# EAGLE board 10sensors (EAGLE 9.6.2), part 1 of 3
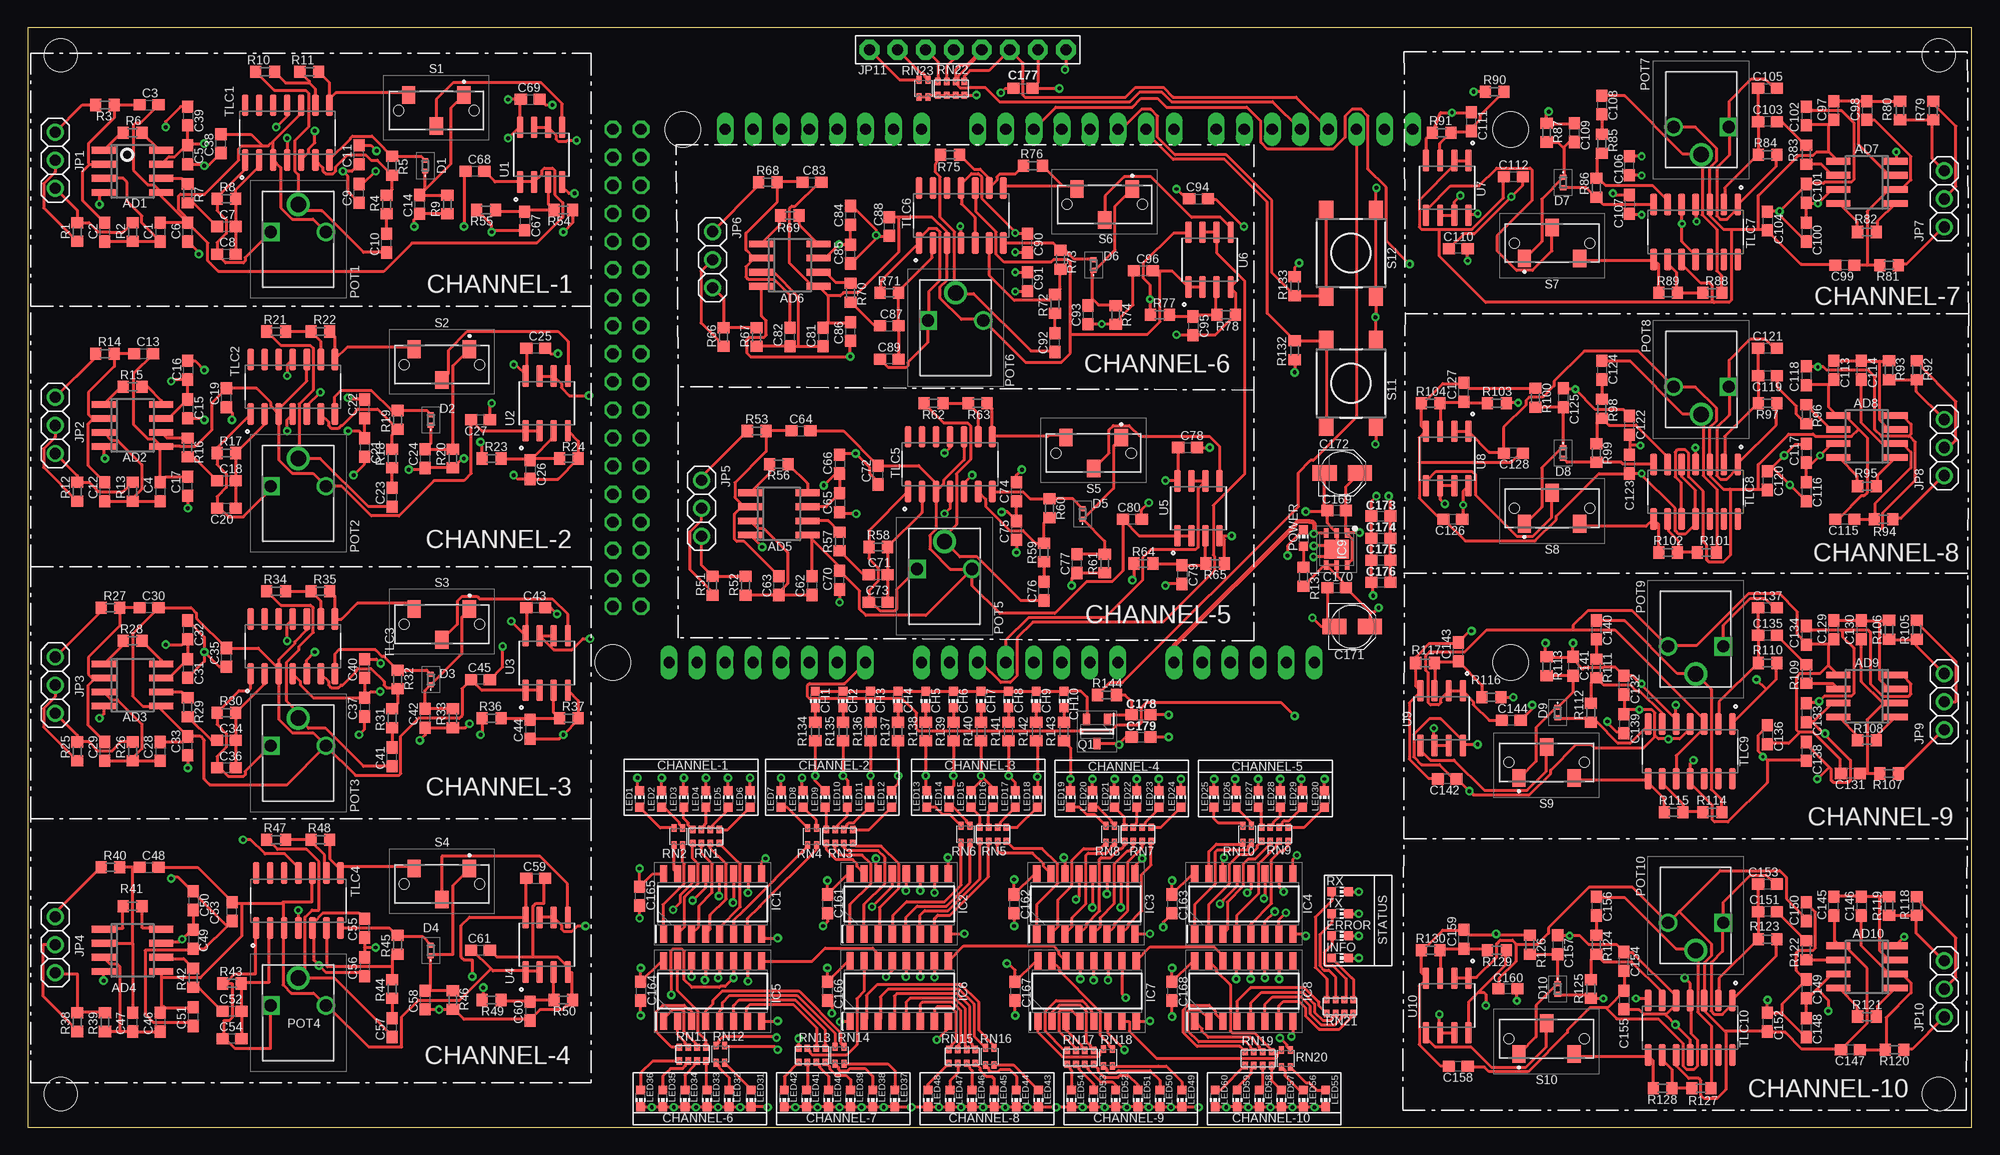
[diagram p0: board, top side]
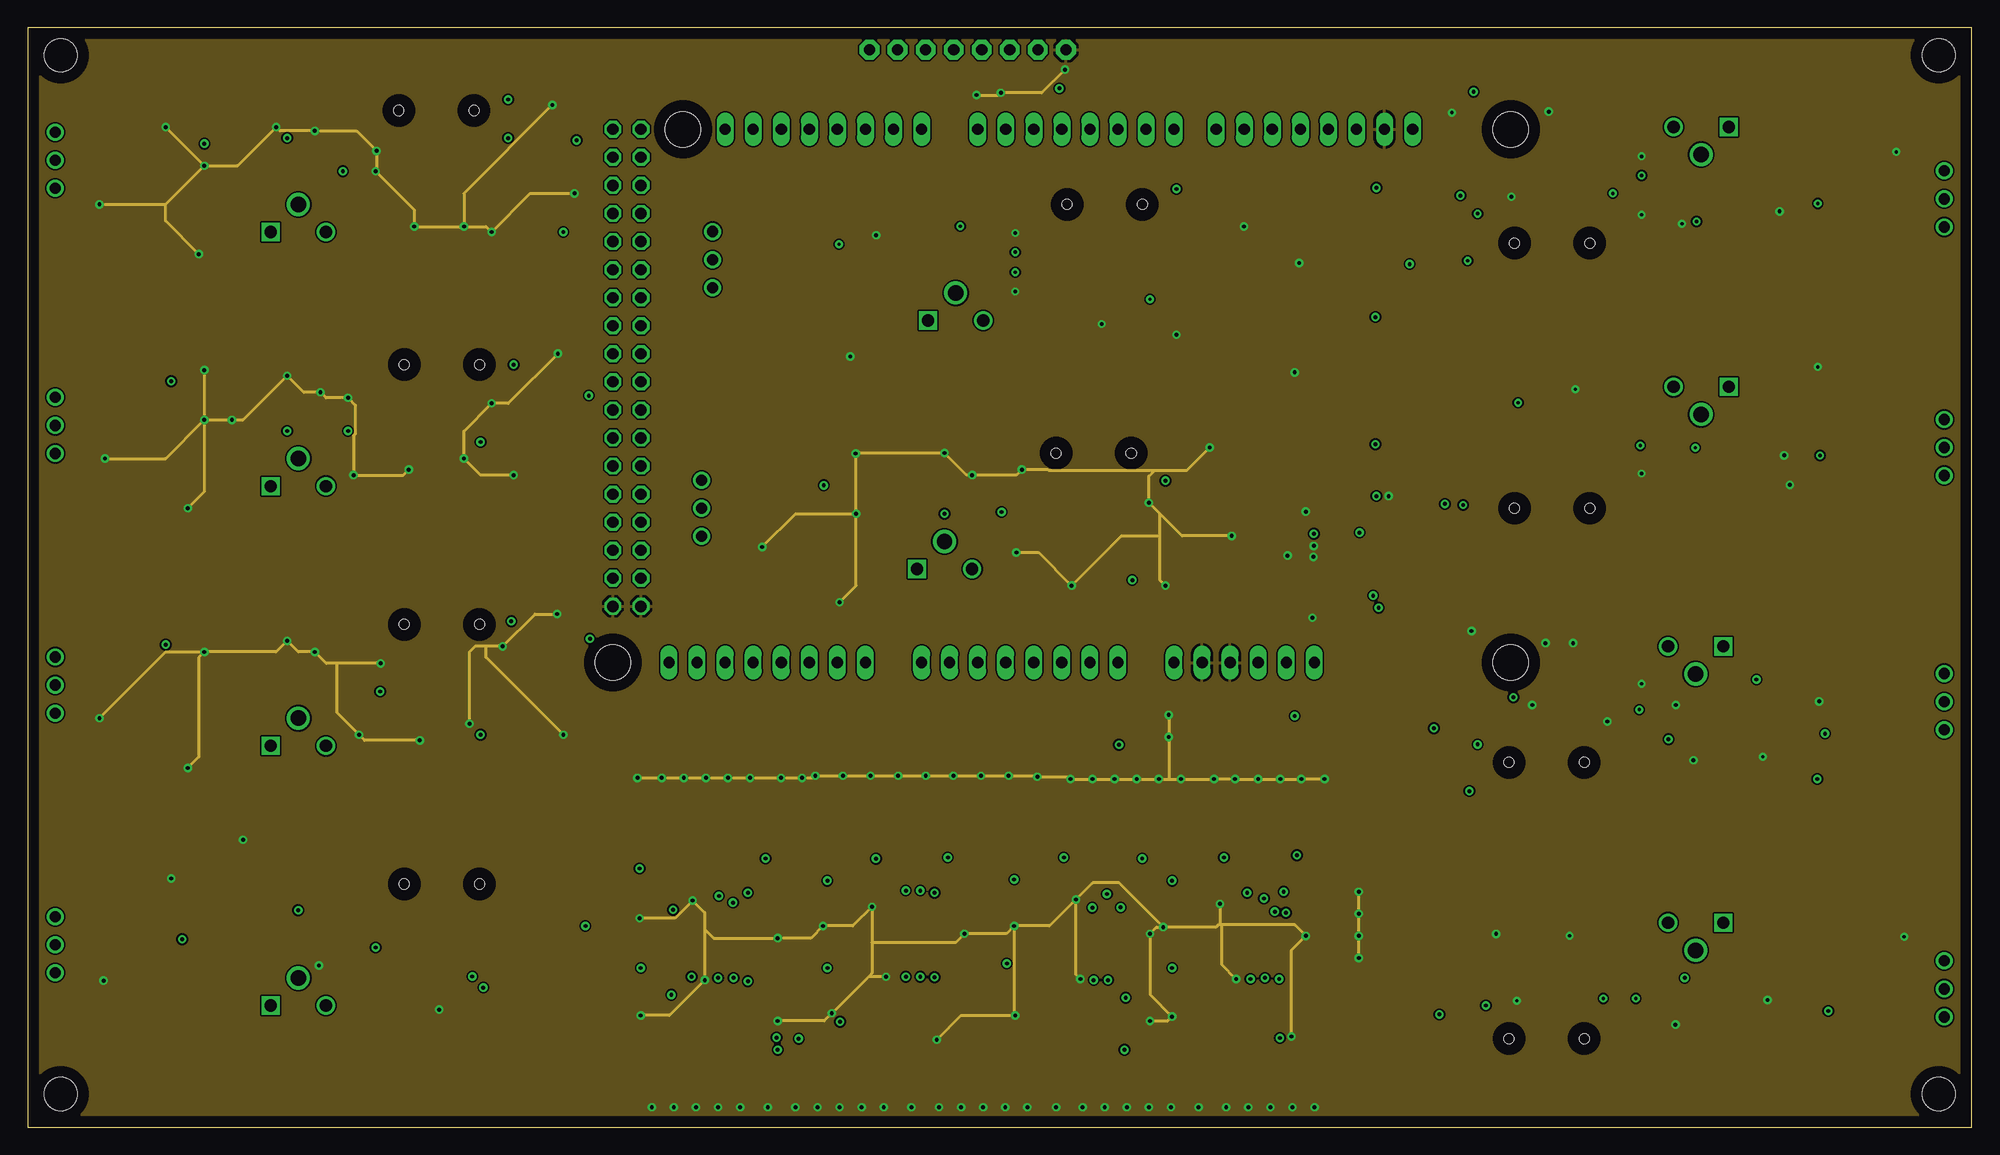
[diagram p1: board, inner layer Route2]
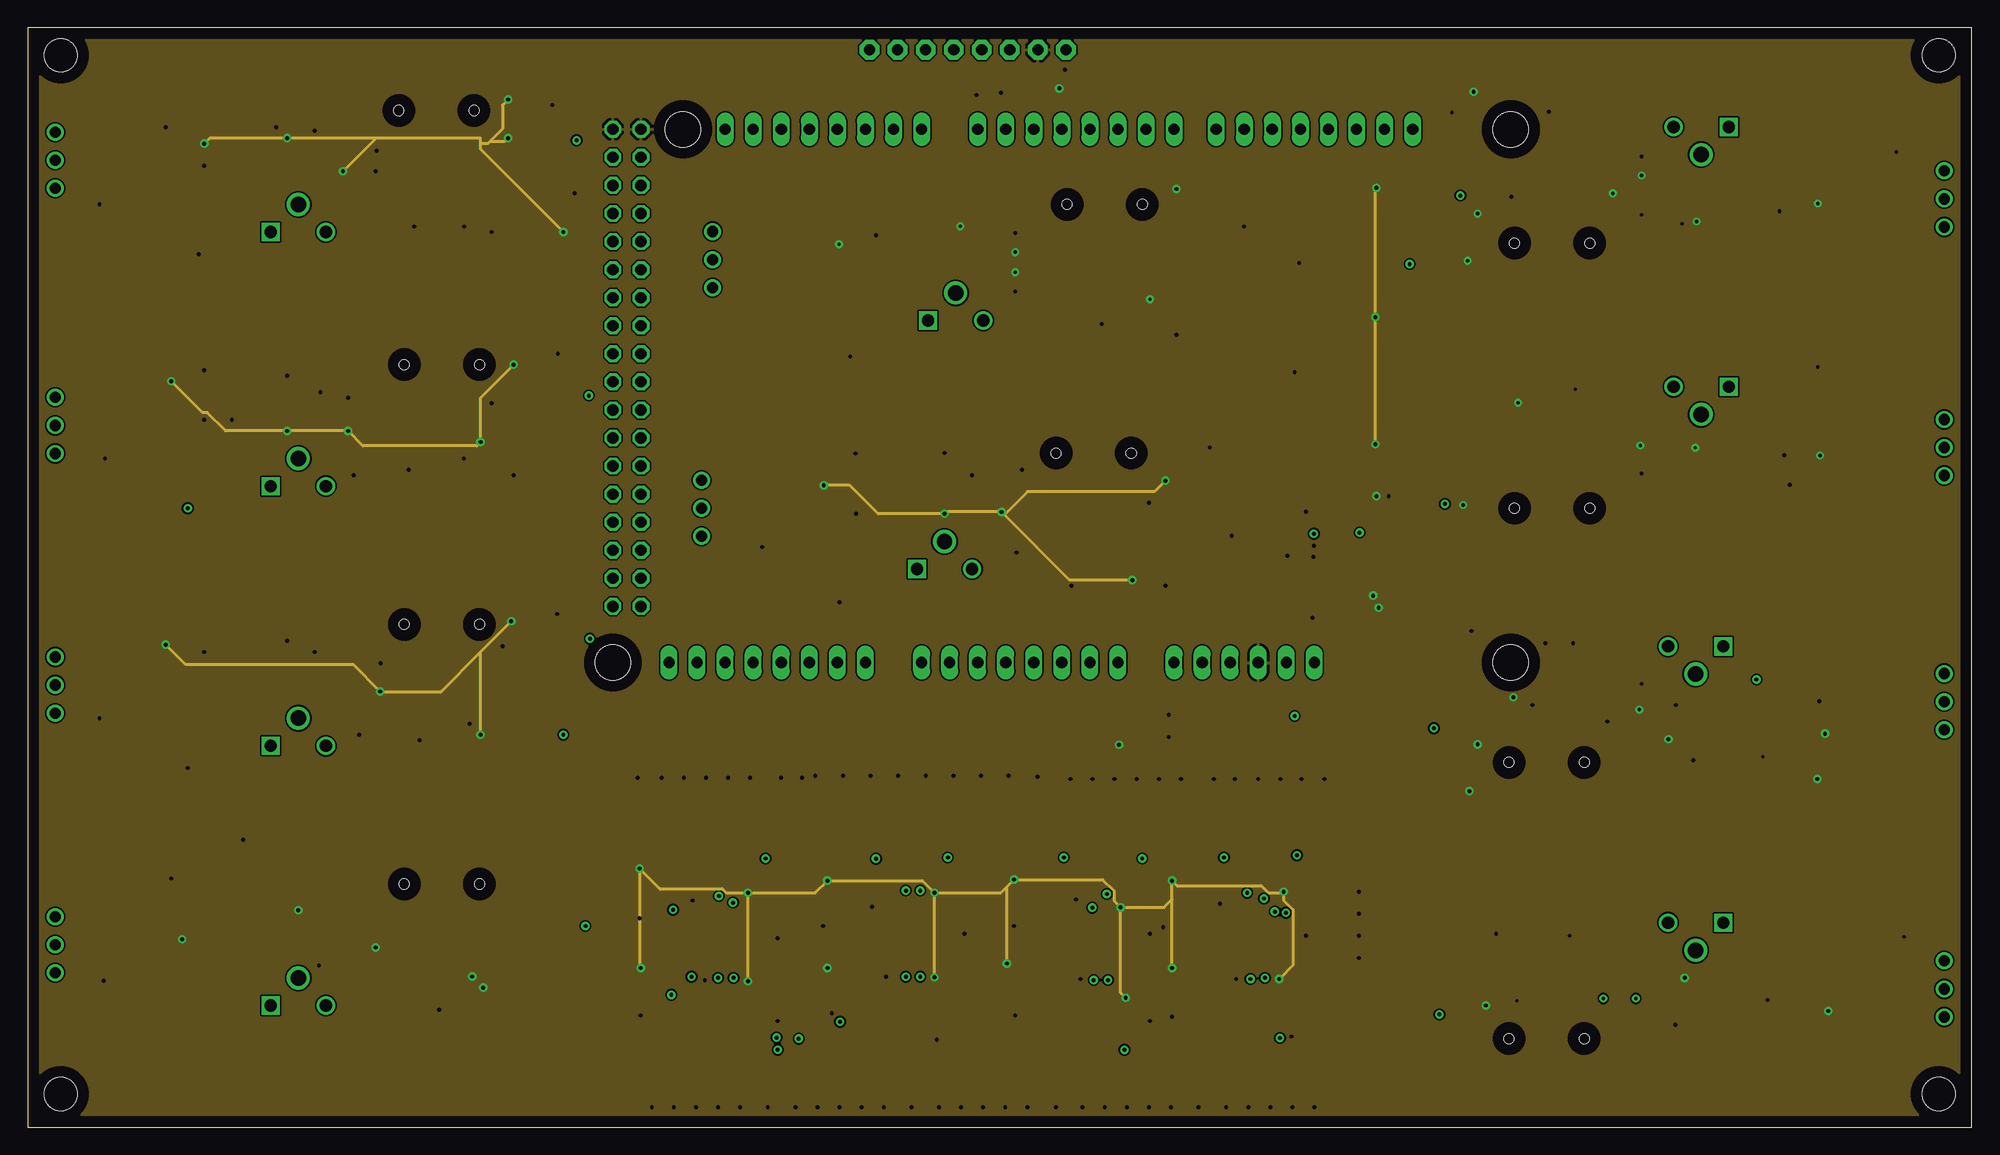
[diagram p2: board, inner layer Route15]
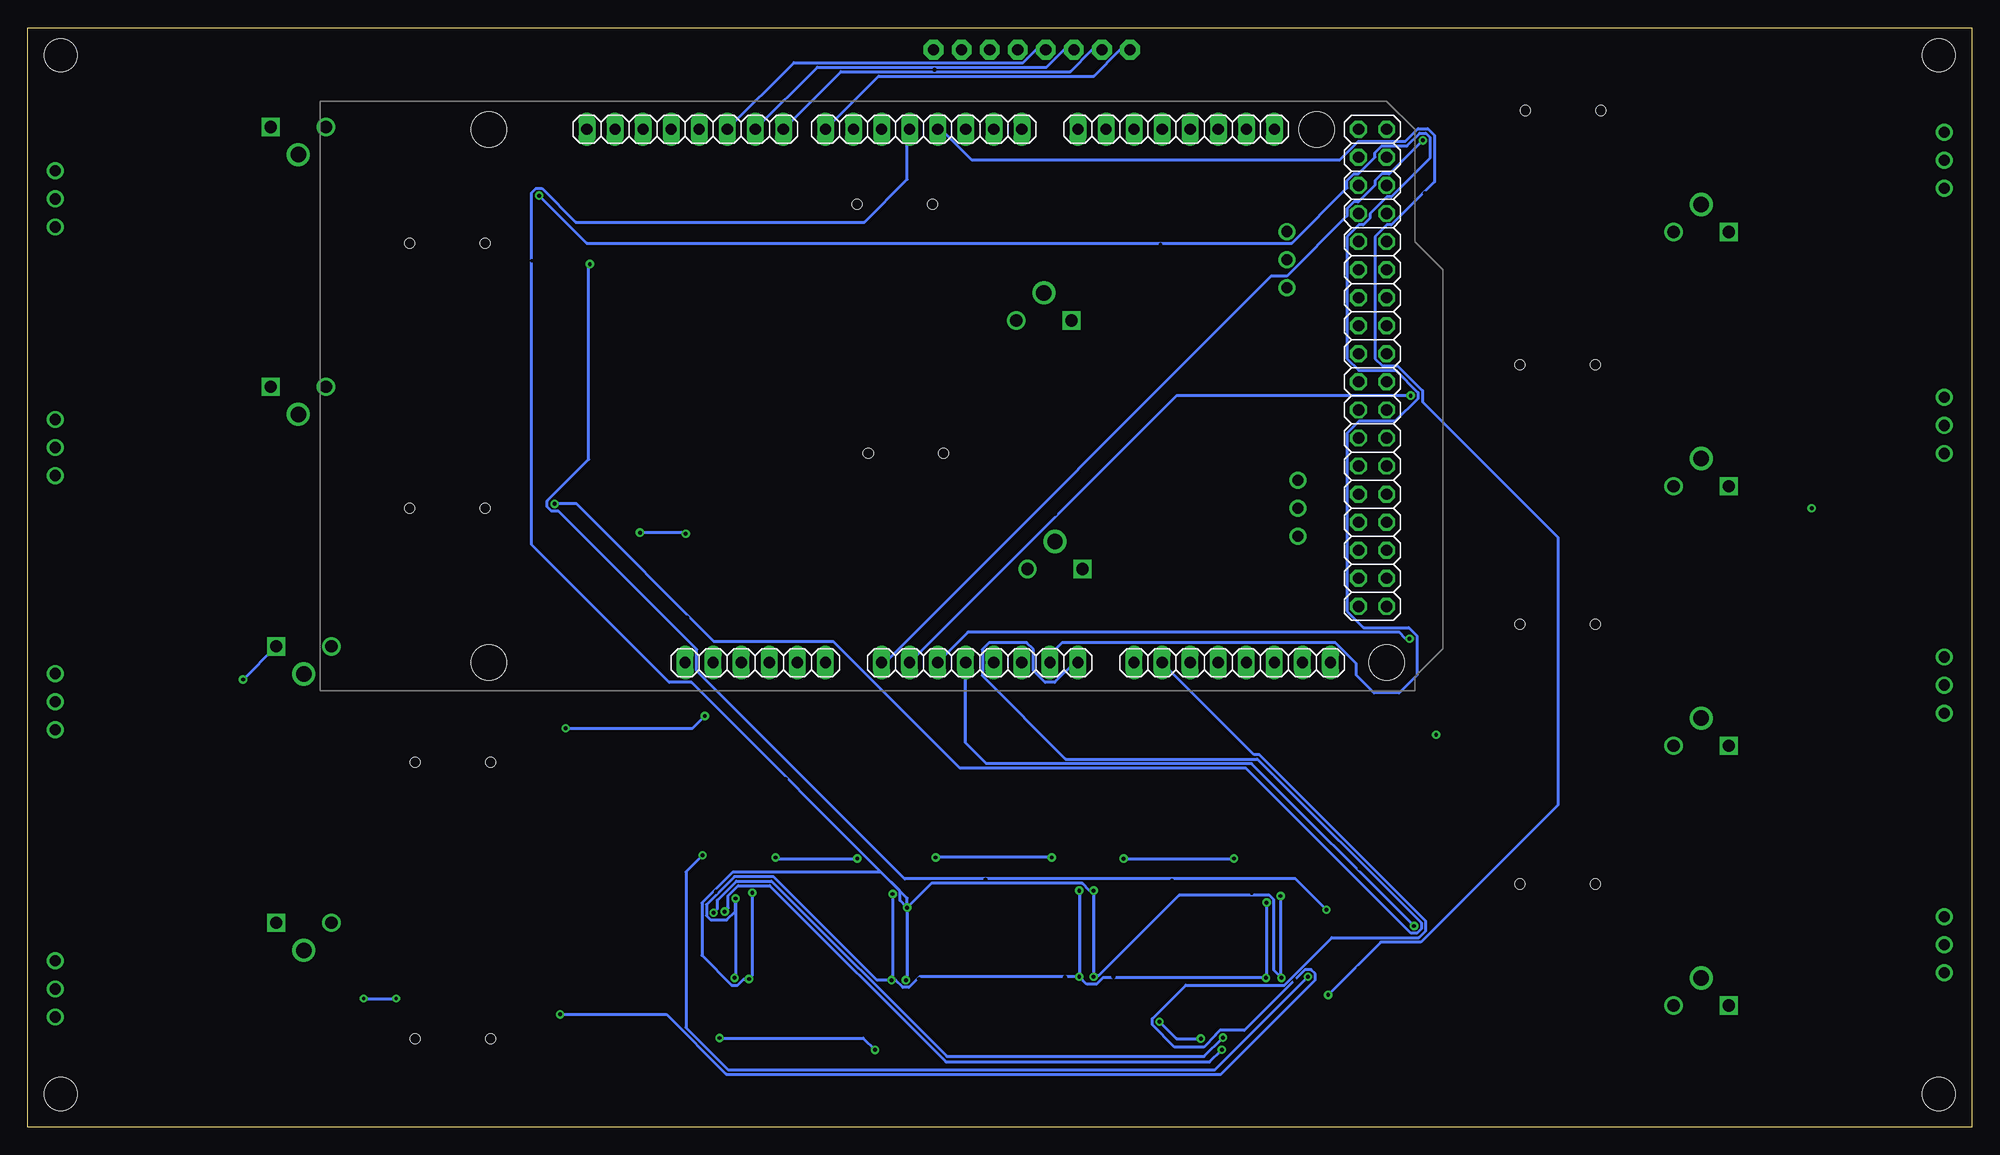
[diagram p3: board, bottom side, seen from below]

Size 176 x 99.5 mm. Coordinates in mm from the lower left corner, seen from the top.
Outline: 0,0 176,0 176,99.5 0,99.5 0,0
Copper layers ([2:[15:1+2*15+16]]): Top 0.035mm / dielectric 1.5mm / Route2 0.035mm / dielectric 0.15mm / Route15 0.035mm / dielectric 0.2mm / Bottom 0.035mm
Design rules "default *": minimum track width 6mil, minimum drill 0.3mm, track to track 6mil, track to pad 6mil, pad to pad 6mil, via to via 6mil, smd to smd 6mil, copper to edge 40mil, drill to drill 6mil, minimum pad ring 10mil, minimum via ring 8mil, stop-mask expansion 4mil, vias tented up to drill 0mil, thermal gap 10mil
Net classes: 0 default: width 0.254 mm; 1 New Class: width 0.254 mm, drill 0.008 mm
Holes 3 mm at 3,97 3,3 173,3 173,97

## Footprints (pad centres in the part's own frame; a part is rotated, then mirrored left to right if it is on the bottom)
SO8 = smd 0.6 x 2.2: 1 -1.905,-2.6; 2 -0.635,-2.6; 3 0.635,-2.6; 4 1.905,-2.6; 5 1.905,2.6; 6 0.635,2.6; 7 -0.635,2.6; 8 -1.905,2.6
C0603 = smd 1.1 x 1: 1 -0.85,0; 2 0.85,0
PANASONIC_B = smd 2.2 x 1.4: + 1.6,0; - -1.6,0
0603 = smd 1.1 x 1: 1 -0.85,0; 2 0.85,0
CHIP-LED0603 = smd 0.8 x 0.8: A 0,-0.75; C 0,0.75
RB886CST2RA = smd 0.55 x 0.45: 1 0,0.475; 2 0,-0.475
SOIC127P600X175-16N = smd 1.55 x 0.65: 1 -2.725,4.445; 2 -2.725,3.175; 3 -2.725,1.905; 4 -2.725,0.635; 5 -2.725,-0.635; 6 -2.725,-1.905; 7 -2.725,-3.175; 8 -2.725,-4.445; 9 2.725,-4.445; 10 2.725,-3.175; 11 2.725,-1.905; 12 2.725,-0.635; 13 2.725,0.635; 14 2.725,1.905; 15 2.725,3.175; 16 2.725,4.445
SON95P300X300X80-7N = smd 0.85 x 0.4: 1 -1.45,0.95; 2 -1.45,0; 3 -1.45,-0.95; 4 1.45,-0.95; 5 1.45,0; 6 1.45,0.95 | smd 1.7 x 2.2: 7 0,0
MEGA_ARDUINO_2 = drill 1.016 long: 1 33.02,2.54; 2 35.56,2.54; 3 38.1,2.54; 4 40.64,2.54; 5 43.18,2.54; 6 45.72,2.54; 7 50.8,2.54; 8 53.34,2.54; 9 55.88,2.54; 10 58.42,2.54; 11 60.96,2.54; 12 63.5,2.54; 13 66.04,2.54; 14 68.58,2.54; 15 73.66,2.54; 16 76.2,2.54; 17 78.74,2.54; 18 81.28,2.54; 19 83.82,2.54; 20 86.36,2.54; 21 88.9,2.54; 22 91.44,2.54; 23 86.36,50.8; 24 83.82,50.8; 25 81.28,50.8; 26 78.74,50.8; 27 76.2,50.8; 28 73.66,50.8; 29 71.12,50.8; 30 68.58,50.8; 31 63.5,50.8; 32 60.96,50.8; 33 58.42,50.8; 34 55.88,50.8; 35 53.34,50.8; 36 50.8,50.8; 37 48.26,50.8; 38 45.72,50.8; 39 41.91,50.8; 40 39.37,50.8; 41 36.83,50.8; 42 34.29,50.8; 43 31.75,50.8; 44 29.21,50.8; 45 26.67,50.8; 46 24.13,50.8 | drill 1.016 octagon: 47 93.98,50.8; 48 96.52,50.8; 49 93.98,48.26; 50 96.52,48.26; 51 93.98,45.72; 52 96.52,45.72; 53 93.98,43.18; 54 96.52,43.18; 55 93.98,40.64; 56 96.52,40.64; 57 93.98,38.1; 58 96.52,38.1; 59 93.98,35.56; 60 96.52,35.56; 61 93.98,33.02; 62 96.52,33.02; 63 93.98,30.48; 64 96.52,30.48; 65 93.98,27.94; 66 96.52,27.94; 67 93.98,25.4; 68 96.52,25.4; 69 93.98,22.86; 70 96.52,22.86; 71 93.98,20.32; 72 96.52,20.32; 73 93.98,17.78; 74 96.52,17.78; 75 93.98,15.24; 76 96.52,15.24; 77 93.98,12.7; 78 96.52,12.7; 79 93.98,10.16; 80 96.52,10.16; 81 93.98,7.62; 82 96.52,7.62 | hole 3.2: 15.24,50.8; 15.24,2.54; 90.17,50.8; 96.52,2.54
1X03 = drill 1.016: 1 -2.54,0; 2 0,0; 3 2.54,0
1X08-BIG = drill 1.016 pad 1.778 octagon: 1 -8.89,0; 2 -6.35,0; 3 -3.81,0; 4 -1.27,0; 5 1.27,0; 6 3.81,0; 7 6.35,0; 8 8.89,0
N6L25T3N1033030 = drill 1.1 pad 1.65 square: 1 0,0 | drill 1.4 pad 2.1: 2 2.5,2.5 | drill 1.1 pad 1.65: 3 5,0
SOT95P230X110-3N = smd 1.05 x 0.6: 1 -1.1,0.95; 2 -1.1,-0.95; 3 1.1,0
R0603 = smd 1 x 1.1: 1 -0.85,0; 2 0.85,0
0603-ARC = smd 0.5 x 0.65: 1 -1.2,-0.625; 2 -0.4,-0.625; 3 0.4,-0.625; 4 1.2,-0.625; 5 1.2,0.625; 6 0.4,0.625; 7 -0.4,0.625; 8 -1.2,0.625
EXBV4V = smd 0.45 x 0.7: 1 -0.4,-0.775; 2 0.4,-0.775; 3 0.4,0.775; 4 -0.4,0.775
CLSB12A02T = smd 1.2 x 1.6: 1 -2.5,-1.4; 2 0,1.4; 3 2.5,-1.4 | hole 0.9: -3.4,0; 3.4,0
DTSM-6 = smd 1.55 x 1.3: 1 -3.975,2.25; 2 3.975,2.25; 3 -3.975,-2.25; 4 3.975,-2.25
SOIC127P600X175-14N = smd 1.97 x 0.6: 1 -2.475,3.81; 2 -2.475,2.54; 3 -2.475,1.27; 4 -2.475,0; 5 -2.475,-1.27; 6 -2.475,-2.54; 7 -2.475,-3.81; 8 2.475,-3.81; 9 2.475,-2.54; 10 2.475,-1.27; 11 2.475,0; 12 2.475,1.27; 13 2.475,2.54; 14 2.475,3.81
SOIC127P599X175-8N = smd 1.97 x 0.6: 1 -2.47,1.905; 2 -2.47,0.635; 3 -2.47,-0.635; 4 -2.47,-1.905; 5 2.47,-1.905; 6 2.47,-0.635; 7 2.47,0.635; 8 2.47,1.905

## Placement (x,y rotation side)
AD1  AD623R  [SO8]  9.5,86.5 270 top
AD2  AD623R  [SO8]  9.5,63.5 270 top
AD3  AD623R  [SO8]  9.5,40 270 top
AD4  AD623R  [SO8]  9.5,16 270 top
AD5  AD623R  [SO8]  68,55.5 270 top
AD6  AD623R  [SO8]  69,78 270 top
AD7  AD623R  [SO8]  166.5,85.5 90 top
AD8  AD623R  [SO8]  166.5,62.5 90 top
AD9  AD623R  [SO8]  166.5,39 90 top
AD10  AD623R  [SO8]  166.5,14.5 90 top
C1  1nF  [C0603]  12,81 270 top
C2  1nF  [C0603]  7,81 90 top
C3  1nF  [C0603]  11,92.5 0 top
C4  1nF  [C0603]  12,57.5 270 top
C5  0.1uF  [C0603]  14.5,88 270 top
C6  2.2uF  [C0603]  14.5,81 90 top
C7  2.2uF  [C0603]  18,81.5 0 top
C8  180pF  [C0603]  18,79 180 top
C9  1uF  [C0603]  30,84.5 90 top
C10  10uF  [C0603]  32.5,80 90 top
C11  0.1uF  [C0603]  30,88 90 top
C12  1nF  [C0603]  7,57.5 90 top
C13  1nF  [C0603]  10.5,70 0 top
C14  10uF  [C0603]  35.5,83.5 90 top
C15  0.1uF  [C0603]  14.5,65 270 top
C16  20pF  [C0603]  14.5,68.5 270 top
C17  2.2uF  [C0603]  14.5,58 90 top
C18  2.2uF  [C0603]  18,58.5 0 top
C19  2.2uF  [C0603]  18,66 90 top
C20  180pF  [C0603]  18,56 180 top
C21  0.1uF  [C0603]  30.5,61.5 270 top
C22  1uF  [C0603]  30.5,65 90 top
C23  10uF  [C0603]  33,57 90 top
C24  10uF  [C0603]  36,60.5 90 top
C25  10uF  [C0603]  46,70.5 0 top
C26  10uF  [C0603]  45.5,59.5 270 top
C27  10uF  [C0603]  41,64 180 top
C28  1nF  [C0603]  12,34 270 top
C29  1nF  [C0603]  7,34 90 top
C30  1nF  [C0603]  11,47 0 top
C31  0.1uF  [C0603]  14.5,41.5 270 top
C32  20pF  [C0603]  14.5,45 270 top
C33  2.2uF  [C0603]  14.5,34.5 90 top
C34  2.2uF  [C0603]  18,35 0 top
C35  2.2uF  [C0603]  18,42.5 90 top
C36  180pF  [C0603]  18,32.5 180 top
C37  0.1uF  [C0603]  30.5,38 270 top
C38  2.2uF  [C0603]  17.5,89 90 top
C39  20pF  [C0603]  14.5,91.5 270 top
C40  1uF  [C0603]  30.5,41.5 90 top
C41  10uF  [C0603]  33,33.5 90 top
C42  10uF  [C0603]  36,37 90 top
C43  10uF  [C0603]  46,47 0 top
C44  10uF  [C0603]  45.5,36 270 top
C45  10uF  [C0603]  41,40.5 180 top
C46  1nF  [C0603]  12,9.5 270 top
C47  1nF  [C0603]  9.5,9.5 90 top
C48  1nF  [C0603]  11,23.5 0 top
C49  0.1uF  [C0603]  15,17 270 top
C50  20pF  [C0603]  15,20.5 270 top
C51  2.2uF  [C0603]  15,10 90 top
C52  2.2uF  [C0603]  18.5,10.5 0 top
C53  2.2uF  [C0603]  18.5,19.5 90 top
C54  180pF  [C0603]  18.5,8 180 top
C55  0.1uF  [C0603]  30.5,18 90 top
C56  1uF  [C0603]  30.5,14.5 270 top
C57  10uF  [C0603]  33,9 90 top
C58  10uF  [C0603]  36,11.5 90 top
C59  10uF  [C0603]  46,22.5 0 top
C60  10uF  [C0603]  45.5,10.5 270 top
C61  10uF  [C0603]  41,16 180 top
C62  1nF  [C0603]  71,49 270 top
C63  1nF  [C0603]  68,49 90 top
C64  1nF  [C0603]  70,63 0 top
C65  0.1uF  [C0603]  73.5,56.5 270 top
C66  20pF  [C0603]  73.5,60 270 top
C67  10uF  [C0603]  45,82 270 top
C68  10uF  [C0603]  40.5,86.5 0 top
C69  10uF  [C0603]  45.5,93 0 top
C70  2.2uF  [C0603]  73.5,49.5 90 top
C71  2.2uF  [C0603]  77,50 0 top
C72  2.2uF  [C0603]  77,59 90 top
C73  180pF  [C0603]  77,47.5 180 top
C74  0.1uF  [C0603]  89.5,57.5 90 top
C75  1uF  [C0603]  89.5,54 270 top
C76  10uF  [C0603]  92,48.5 90 top
C77  10uF  [C0603]  95,51 90 top
C78  10uF  [C0603]  105,61.5 0 top
C79  10uF  [C0603]  104.5,50 270 top
C80  10uF  [C0603]  100,55 180 top
C81  1nF  [C0603]  72,71.5 270 top
C82  1nF  [C0603]  69,71.5 90 top
C83  1nF  [C0603]  71,85.5 0 top
C84  0.1uF  [C0603]  74.5,82.5 90 top
C85  20pF  [C0603]  74.5,79 90 top
C86  2.2uF  [C0603]  74.5,72 90 top
C87  2.2uF  [C0603]  78,72.5 0 top
C88  2.2uF  [C0603]  78,81.5 90 top
C89  180pF  [C0603]  78,69.5 180 top
C90  0.1uF  [C0603]  90.5,80 90 top
C91  1uF  [C0603]  90.5,76.5 270 top
C92  10uF  [C0603]  93,71 90 top
C93  10uF  [C0603]  96,73.5 90 top
C94  10uF  [C0603]  106,84 0 top
C95  10uF  [C0603]  105.5,72.5 270 top
C96  10uF  [C0603]  101,77.5 0 top
C97  1nF  [C0603]  163.5,92 90 top
C98  1nF  [C0603]  166.5,92 270 top
C99  1nF  [C0603]  164.5,78 180 top
C100  0.1uF  [C0603]  161,81 270 top
C101  20pF  [C0603]  161,84.5 270 top
C102  2.2uF  [C0603]  161,91.5 270 top
C103  2.2uF  [C0603]  157.5,91 180 top
C104  2.2uF  [C0603]  157.5,82 270 top
C105  180pF  [C0603]  157.5,94 0 top
C106  0.1uF  [C0603]  145,87 90 top
C107  1uF  [C0603]  145,83.5 270 top
C108  10uF  [C0603]  142.5,92.5 270 top
C109  10uF  [C0603]  140,90 270 top
C110  10uF  [C0603]  129.5,79.5 180 top
C111  10uF  [C0603]  130.7,91 90 top
C112  10uF  [C0603]  134.5,86 180 top
C113  1nF  [C0603]  163.5,68.5 90 top
C114  1nF  [C0603]  166,68.5 270 top
C115  1nF  [C0603]  164.5,55 180 top
C116  0.1uF  [C0603]  161,57.5 270 top
C117  20pF  [C0603]  161,61 270 top
C118  2.2uF  [C0603]  161,68 270 top
C119  2.2uF  [C0603]  157.5,68 180 top
C120  2.2uF  [C0603]  157.5,58.5 270 top
C121  180pF  [C0603]  157.5,70.5 0 top
C122  0.1uF  [C0603]  145,63.5 90 top
C123  1uF  [C0603]  145,60 270 top
C124  10uF  [C0603]  142.5,68.5 270 top
C125  10uF  [C0603]  139,66 270 top
C126  10uF  [C0603]  129,55 180 top
C127  10uF  [C0603]  130,66.5 90 top
C128  10uF  [C0603]  134.5,61 180 top
C129  1nF  [C0603]  163.5,45 90 top
C130  1nF  [C0603]  166,45 270 top
C131  1nF  [C0603]  165,32 180 top
C132  0.1uF  [C0603]  144.5,40 90 top
C133  20pF  [C0603]  161,37.5 270 top
C134  2.2uF  [C0603]  161,44.5 270 top
C135  2.2uF  [C0603]  157.5,44.5 180 top
C136  2.2uF  [C0603]  157.5,35.5 270 top
C137  180pF  [C0603]  157.5,47 0 top
C138  0.1uF  [C0603]  161,34 270 top
C139  1uF  [C0603]  144.5,36.5 270 top
C140  10uF  [C0603]  142,45 270 top
C141  10uF  [C0603]  139.9,41.7 270 top
C142  10uF  [C0603]  128.5,31.5 180 top
C143  10uF  [C0603]  129.5,43 90 top
C144  10uF  [C0603]  134.3,36.8 180 top
C145  1nF  [C0603]  163.5,20 90 top
C146  1nF  [C0603]  166,20 270 top
C147  1nF  [C0603]  165,7 180 top
C148  0.1uF  [C0603]  161,9 270 top
C149  20pF  [C0603]  161,12.5 270 top
C150  2.2uF  [C0603]  161,19.5 270 top
C151  2.2uF  [C0603]  157.5,19.5 180 top
C152  2.2uF  [C0603]  157.5,9.5 270 top
C153  180pF  [C0603]  157.5,22 0 top
C154  0.1uF  [C0603]  144.5,15 90 top
C155  1uF  [C0603]  144.5,11.5 270 top
C156  10uF  [C0603]  142,20 270 top
C157  10uF  [C0603]  138.5,16.5 270 top
C158  10uF  [C0603]  129.5,5.5 180 top
C159  10uF  [C0603]  130,17 90 top
C160  10uF  [C0603]  134,12.5 180 top
C161  0.1uF  [C0603]  72.4,20.2 270 top
C162  0.1uF  [C0603]  89.3,20.2 270 top
C163  0.1uF  [C0603]  103.6,20.2 270 top
C164  0.1uF  [C0603]  55.5,12.3 270 top
C165  0.1uF  [C0603]  55.4,20.9 270 top
C166  0.1uF  [C0603]  72.4,12.3 270 top
C167  0.1uF  [C0603]  89.4,12.3 270 top
C168  0.1uF  [C0603]  103.6,12.3 270 top
C169  0.1uF  [C0603]  118.5,55.8 180 top
C170  0.1uF  [C0603]  118.5,48.8 0 top
C171  EEEHB1C100R  [PANASONIC_B]  119.9,45.3 0 top
C172  EEEHB1C100R  [PANASONIC_B]  119,59.2 0 top
C173  0.1uF  [0603]  122.5,55.3 0 top
C174  1.0uF  [0603]  122.5,53.3 0 top
C175  1.0uF  [0603]  122.5,51.3 0 top
C176  10uF  [0603]  122.5,49.3 0 top
C177  0.1uF  [0603]  90.1,94 0 top
C178  0.1uF  [0603]  100.8,37.3 0 top
C179  0.1uF  [0603]  100.8,35.3 0 top
CH1  GREEN  [CHIP-LED0603]  71.3,38.7 180 top
CH2  YELLOW  [CHIP-LED0603]  73.8,38.7 180 top
CH3  BLUE  [CHIP-LED0603]  76.3,38.7 180 top
CH4  RED  [CHIP-LED0603]  78.8,38.7 180 top
CH5  WHITE  [CHIP-LED0603]  81.3,38.7 180 top
CH6  ORANGE  [CHIP-LED0603]  83.8,38.7 180 top
CH7  GREEN  [CHIP-LED0603]  86.3,38.7 180 top
CH8  YELLOW  [CHIP-LED0603]  88.8,38.7 180 top
CH9  BLUE  [CHIP-LED0603]  91.3,38.7 180 top
CH10  RED  [CHIP-LED0603]  93.8,38.7 180 top
D1  RB886CST2RA  [RB886CST2RA]  36,87 180 top
D2  RB886CST2RA  [RB886CST2RA]  36.5,64 180 top
D3  RB886CST2RA  [RB886CST2RA]  36.5,40.5 180 top
D4  RB886CST2RA  [RB886CST2RA]  36.5,16 180 top
D5  RB886CST2RA  [RB886CST2RA]  95.5,55.5 180 top
D6  RB886CST2RA  [RB886CST2RA]  96.5,78 180 top
D7  RB886CST2RA  [RB886CST2RA]  139,85.5 0 top
D8  RB886CST2RA  [RB886CST2RA]  139,61 0 top
D9  RB886CST2RA  [RB886CST2RA]  138.5,37.5 0 top
D10  RB886CST2RA  [RB886CST2RA]  138.5,12.5 0 top
ERROR  RED  [CHIP-LED0603]  118.8,17.3 270 top
IC1  74HC595DG  [SOIC127P600X175-16N]  62,20.2 90 top
IC2  74HC595DG  [SOIC127P600X175-16N]  78.9,20.2 90 top
IC3  74HC595DG  [SOIC127P600X175-16N]  95.8,20.2 90 top
IC4  74HC595DG  [SOIC127P600X175-16N]  110.1,20.2 90 top
IC5  74HC595DG  [SOIC127P600X175-16N]  62,12.3 90 top
IC6  74HC595DG  [SOIC127P600X175-16N]  78.9,12.3 90 top
IC7  74HC595DG  [SOIC127P600X175-16N]  95.9,12.3 90 top
IC8  74HC595DG  [SOIC127P600X175-16N]  110.1,12.3 90 top
IC9  LP38692SD-5.0_NOPB  [SON95P300X300X80-7N]  118.5,52.3 270 top
IC10  [MEGA_ARDUINO_2]  149.5,39.5 0 bottom
INFO  BLUE  [CHIP-LED0603]  118.8,15.3 270 top
JP1  [1X03]  2.5,87.5 270 top
JP2  [1X03]  2.5,63.5 270 top
JP3  [1X03]  2.5,40 270 top
JP4  [1X03]  2.5,16.5 270 top
JP5  [1X03]  61,56 270 top
JP6  [1X03]  62,78.5 270 top
JP7  [1X03]  173.5,84 90 top
JP8  [1X03]  173.5,61.5 90 top
JP9  [1X03]  173.5,38.5 90 top
JP10  [1X03]  173.5,12.5 90 top
JP11  [1X08-BIG]  85.1,97.5 0 top
LED1  GREEN  [CHIP-LED0603]  55.4,29.7 0 top
LED2  GREEN  [CHIP-LED0603]  57.4,29.7 0 top
LED3  YELLOW  [CHIP-LED0603]  59.4,29.7 0 top
LED4  YELLOW  [CHIP-LED0603]  61.4,29.7 0 top
LED5  RED  [CHIP-LED0603]  63.4,29.7 0 top
LED6  RED  [CHIP-LED0603]  65.4,29.7 0 top
LED7  GREEN  [CHIP-LED0603]  68.2,29.7 0 top
LED8  GREEN  [CHIP-LED0603]  70.2,29.7 0 top
LED9  YELLOW  [CHIP-LED0603]  72.2,29.7 0 top
LED10  YELLOW  [CHIP-LED0603]  74.2,29.7 0 top
LED11  RED  [CHIP-LED0603]  76.2,29.7 0 top
LED12  RED  [CHIP-LED0603]  78.2,29.7 0 top
LED13  GREEN  [CHIP-LED0603]  81.4,29.7 0 top
LED14  GREEN  [CHIP-LED0603]  83.4,29.7 0 top
LED15  YELLOW  [CHIP-LED0603]  85.4,29.7 0 top
LED16  YELLOW  [CHIP-LED0603]  87.4,29.7 0 top
LED17  RED  [CHIP-LED0603]  89.4,29.7 0 top
LED18  RED  [CHIP-LED0603]  91.4,29.7 0 top
LED19  GREEN  [CHIP-LED0603]  94.4,29.7 0 top
LED20  GREEN  [CHIP-LED0603]  96.4,29.7 0 top
LED21  YELLOW  [CHIP-LED0603]  98.4,29.7 0 top
LED22  YELLOW  [CHIP-LED0603]  100.4,29.7 0 top
LED23  RED  [CHIP-LED0603]  102.4,29.7 0 top
LED24  RED  [CHIP-LED0603]  104.4,29.7 0 top
LED25  GREEN  [CHIP-LED0603]  107.4,29.7 0 top
LED26  GREEN  [CHIP-LED0603]  109.4,29.7 0 top
LED27  YELLOW  [CHIP-LED0603]  111.4,29.7 0 top
LED28  YELLOW  [CHIP-LED0603]  113.4,29.7 0 top
LED29  RED  [CHIP-LED0603]  115.4,29.7 0 top
LED30  RED  [CHIP-LED0603]  117.4,29.7 0 top
LED31  GREEN  [CHIP-LED0603]  65.5,2.6 180 top
LED32  GREEN  [CHIP-LED0603]  63.5,2.6 180 top
LED33  YELLOW  [CHIP-LED0603]  61.5,2.6 180 top
LED34  YELLOW  [CHIP-LED0603]  59.5,2.6 180 top
LED35  RED  [CHIP-LED0603]  57.5,2.6 180 top
LED36  RED  [CHIP-LED0603]  55.5,2.6 180 top
LED37  GREEN  [CHIP-LED0603]  78.5,2.6 180 top
LED38  GREEN  [CHIP-LED0603]  76.5,2.6 180 top
LED39  YELLOW  [CHIP-LED0603]  74.5,2.6 180 top
LED40  YELLOW  [CHIP-LED0603]  72.5,2.6 180 top
LED41  RED  [CHIP-LED0603]  70.5,2.6 180 top
LED42  RED  [CHIP-LED0603]  68.5,2.6 180 top
LED43  GREEN  [CHIP-LED0603]  91.5,2.6 180 top
LED44  GREEN  [CHIP-LED0603]  89.5,2.6 180 top
LED45  YELLOW  [CHIP-LED0603]  87.5,2.6 180 top
LED46  YELLOW  [CHIP-LED0603]  85.5,2.6 180 top
LED47  RED  [CHIP-LED0603]  83.5,2.6 180 top
LED48  RED  [CHIP-LED0603]  81.5,2.6 180 top
LED49  GREEN  [CHIP-LED0603]  104.5,2.6 180 top
LED50  GREEN  [CHIP-LED0603]  102.5,2.6 180 top
LED51  YELLOW  [CHIP-LED0603]  100.5,2.6 180 top
LED52  YELLOW  [CHIP-LED0603]  98.5,2.6 180 top
LED53  RED  [CHIP-LED0603]  96.5,2.6 180 top
LED54  RED  [CHIP-LED0603]  94.5,2.6 180 top
LED55  GREEN  [CHIP-LED0603]  117.5,2.6 180 top
LED56  GREEN  [CHIP-LED0603]  115.5,2.6 180 top
LED57  YELLOW  [CHIP-LED0603]  113.5,2.6 180 top
LED58  YELLOW  [CHIP-LED0603]  111.5,2.6 180 top
LED59  RED  [CHIP-LED0603]  109.5,2.6 180 top
LED60  RED  [CHIP-LED0603]  107.5,2.6 180 top
POT1  N6L25T3N-103-3030  [N6L25T3N1033030]  22,81 0 top
POT2  N6L25T3N-103-3030  [N6L25T3N1033030]  22,58 0 top
POT3  N6L25T3N-103-3030  [N6L25T3N1033030]  22,34.5 0 top
POT4  N6L25T3N-103-3030  [N6L25T3N1033030]  22,11 0 top
POT5  N6L25T3N-103-3030  [N6L25T3N1033030]  80.5,50.5 0 top
POT6  N6L25T3N-103-3030  [N6L25T3N1033030]  81.5,73 0 top
POT7  N6L25T3N-103-3030  [N6L25T3N1033030]  154,90.5 180 top
POT8  N6L25T3N-103-3030  [N6L25T3N1033030]  154,67 180 top
POT9  N6L25T3N-103-3030  [N6L25T3N1033030]  153.5,43.5 180 top
POT10  N6L25T3N-103-3030  [N6L25T3N1033030]  153.5,18.5 180 top
POWER  RED  [CHIP-LED0603]  115.5,53.3 0 top
Q1  MMBT2222A,215  [SOT95P230X110-3N]  96.8,35.8 270 top
R1  1K  [R0603]  4.5,81 90 top
R2  47K  [R0603]  9.5,81 270 top
R3  47K  [R0603]  7,92.5 0 top
R4  10K  [R0603]  32.5,83.5 90 top
R5  220K  [R0603]  33,87 270 top
R6  33K  [R0603]  9.5,90 180 top
R7  1.3K  [R0603]  14.5,84.5 270 top
R8  360K  [R0603]  18,84 0 top
R9  47K  [R0603]  38,83.5 90 top
R10  18k  [R0603]  21.5,95.5 180 top
R11  68K  [R0603]  25.5,95.5 0 top
R12  1K  [R0603]  4.5,57.5 90 top
R13  47K  [R0603]  9.5,57.5 270 top
R14  47K  [R0603]  7,70 0 top
R15  33K  [R0603]  9.5,67 180 top
R16  1.3K  [R0603]  14.5,61.5 270 top
R17  360K  [R0603]  18,61 0 top
R18  10K  [R0603]  33,60.5 90 top
R19  220K  [R0603]  33.5,64 270 top
R20  47K  [R0603]  38.5,60.5 90 top
R21  18k  [R0603]  22.5,72 180 top
R22  68K  [R0603]  26.5,72 0 top
R23  10k  [R0603]  42,60.5 0 top
R24  10k  [R0603]  49,60.5 0 top
R25  1K  [R0603]  4.5,34 90 top
R26  47K  [R0603]  9.5,34 270 top
R27  47K  [R0603]  7.5,47 0 top
R28  33K  [R0603]  9.5,44 180 top
R29  1.3K  [R0603]  14.5,38 270 top
R30  360K  [R0603]  18,37.5 0 top
R31  10K  [R0603]  33,37 90 top
R32  220K  [R0603]  33.5,40.5 270 top
R33  47K  [R0603]  38.5,37 90 top
R34  18k  [R0603]  22.5,48.5 180 top
R35  68K  [R0603]  26.5,48.5 0 top
R36  10k  [R0603]  42,37 0 top
R37  10k  [R0603]  49,37 0 top
R38  1K  [R0603]  4.5,9.5 90 top
R39  47K  [R0603]  7,9.5 270 top
R40  47K  [R0603]  7.5,23.5 0 top
R41  33K  [R0603]  9.5,20 180 top
R42  1.3K  [R0603]  15,13.5 270 top
R43  360K  [R0603]  18.5,13 0 top
R44  10K  [R0603]  33,12.5 90 top
R45  220K  [R0603]  33.5,16.5 270 top
R46  47K  [R0603]  38.5,11.5 90 top
R47  18k  [R0603]  22.5,26 180 top
R48  68K  [R0603]  26.5,26 0 top
R49  10k  [R0603]  42,11.5 0 top
R50  10k  [R0603]  48.5,11.5 0 top
R51  1K  [R0603]  62,49 90 top
R52  47K  [R0603]  65,49 270 top
R53  47K  [R0603]  66,63 0 top
R54  10k  [R0603]  48.5,83 180 top
R55  10k  [R0603]  41.5,83 180 top
R56  33K  [R0603]  68,60 180 top
R57  1.3K  [R0603]  73.5,53 270 top
R58  360K  [R0603]  77,52.5 0 top
R59  10K  [R0603]  92,52 90 top
R60  220K  [R0603]  92.5,56 270 top
R61  47K  [R0603]  97.5,51 90 top
R62  18k  [R0603]  82,65.5 180 top
R63  68K  [R0603]  86,65.5 0 top
R64  10k  [R0603]  101,51 0 top
R65  10k  [R0603]  107.5,51 0 top
R66  1K  [R0603]  63,71.5 90 top
R67  47K  [R0603]  66,71.5 270 top
R68  47K  [R0603]  67,85.5 0 top
R69  33K  [R0603]  69,82.5 180 top
R70  1.3K  [R0603]  74.5,75.5 270 top
R71  360K  [R0603]  78,75.5 0 top
R72  10K  [R0603]  93,74.5 90 top
R73  220K  [R0603]  93.5,78.5 270 top
R74  47K  [R0603]  98.5,73.5 90 top
R75  18k  [R0603]  83.5,88 180 top
R76  68K  [R0603]  91,87 0 top
R77  10k  [R0603]  102.5,73.5 0 top
R78  10k  [R0603]  108.5,73.5 0 top
R79  1K  [R0603]  172.5,92 270 top
R80  47K  [R0603]  169.5,92 90 top
R81  47K  [R0603]  168.5,78 180 top
R82  33K  [R0603]  166.5,81 0 top
R83  1.3K  [R0603]  161,88 90 top
R84  360K  [R0603]  157.5,88 180 top
R85  10K  [R0603]  142.5,89 270 top
R86  220K  [R0603]  142,85 90 top
R87  47K  [R0603]  137.5,90 270 top
R88  18k  [R0603]  152.5,75.5 0 top
R89  68K  [R0603]  148.5,75.5 180 top
R90  10k  [R0603]  132.8,93.7 0 top
R91  10k  [R0603]  128,90 180 top
R92  1K  [R0603]  171,68.5 270 top
R93  47K  [R0603]  168.5,68.5 90 top
R94  47K  [R0603]  168,55 180 top
R95  33K  [R0603]  166.5,58 0 top
R96  1.3K  [R0603]  161,64.5 270 top
R97  360K  [R0603]  157.5,65.5 180 top
R98  10K  [R0603]  142.5,65 270 top
R99  220K  [R0603]  142,61 90 top
R100  47K  [R0603]  136.5,66 270 top
R101  18k  [R0603]  152,52 0 top
R102  68K  [R0603]  148.5,52 180 top
R103  10k  [R0603]  133,65.5 180 top
R104  10k  [R0603]  127,65.5 180 top
R105  1K  [R0603]  171,45 270 top
R106  47K  [R0603]  168.5,45 90 top
R107  47K  [R0603]  168.5,32 180 top
R108  33K  [R0603]  166.5,35 0 top
R109  1.3K  [R0603]  161,41 90 top
R110  360K  [R0603]  157.5,42 180 top
R111  10K  [R0603]  142,41.5 270 top
R112  220K  [R0603]  141.5,37.5 90 top
R113  47K  [R0603]  137.5,41.7 270 top
R114  18k  [R0603]  152.5,28.5 0 top
R115  68K  [R0603]  149,28.5 180 top
R116  10k  [R0603]  132.5,38.9 180 top
R117  10k  [R0603]  126.5,42 180 top
R118  1K  [R0603]  171,20 270 top
R119  47K  [R0603]  168.5,20 90 top
R120  47K  [R0603]  169,7 180 top
R121  33K  [R0603]  166.5,10 0 top
R122  1.3K  [R0603]  161,16 90 top
R123  360K  [R0603]  157.5,17 180 top
R124  10K  [R0603]  142,16.5 270 top
R125  220K  [R0603]  141.5,12.5 90 top
R126  47K  [R0603]  136,16.5 270 top
R127  18k  [R0603]  151.5,3.5 0 top
R128  68K  [R0603]  148,3.5 180 top
R129  10k  [R0603]  133,16 180 top
R130  10k  [R0603]  127,16 180 top
R131  300  [R0603]  115.5,49.8 270 top
R132  10K  [R0603]  114.7,70.3 270 top
R133  10K  [R0603]  114.7,76.1 90 top
R134  1K  [R0603]  71.3,35.8 90 top
R135  1K  [R0603]  73.8,35.8 90 top
R136  3K  [R0603]  76.3,35.8 90 top
R137  1K  [R0603]  78.8,35.8 90 top
R138  3K  [R0603]  81.3,35.8 90 top
R139  2K  [R0603]  83.8,35.8 90 top
R140  1K  [R0603]  86.3,35.8 90 top
R141  1K  [R0603]  88.8,35.8 90 top
R142  3K  [R0603]  91.3,35.8 90 top
R143  1K  [R0603]  93.8,35.8 90 top
R144  10K  [R0603]  97.7,39.1 180 top
RN1  ACASA2001S2001P100  [0603-ARC]  61.4,26.3 0 top
RN2  ACASN1001U1001P1AT  [EXBV4V]  58.9,26.3 0 top
RN3  ACASA2001S2001P100  [0603-ARC]  73.5,26.3 0 top
RN4  ACASN1001U1001P1AT  [EXBV4V]  71,26.3 0 top
RN5  ACASA2001S2001P100  [0603-ARC]  87.4,26.5 0 top
RN6  ACASN1001U1001P1AT  [EXBV4V]  84.9,26.5 0 top
RN7  ACASA2001S2001P100  [0603-ARC]  100.5,26.5 0 top
RN8  ACASN1001U1001P1AT  [EXBV4V]  98,26.5 0 top
RN9  ACASA2001S2001P100  [0603-ARC]  112.9,26.5 0 top
RN10  ACASN1001U1001P1AT  [EXBV4V]  110.4,26.5 0 top
RN11  ACASA2001S2001P100  [0603-ARC]  60.2,6.6 180 top
RN12  ACASN1001U1001P1AT  [EXBV4V]  62.7,6.6 180 top
RN13  ACASA2001S2001P100  [0603-ARC]  71,6.5 180 top
RN14  ACASN1001U1001P1AT  [EXBV4V]  73.5,6.5 180 top
RN15  ACASA2001S2001P100  [0603-ARC]  84.6,6.4 180 top
RN16  ACASN1001U1001P1AT  [EXBV4V]  87.1,6.4 180 top
RN17  ACASA2001S2001P100  [0603-ARC]  95.3,6.3 180 top
RN18  ACASN1001U1001P1AT  [EXBV4V]  97.8,6.3 180 top
RN19  ACASA2001S2001P100  [0603-ARC]  111.4,6.2 180 top
RN20  ACASN1001U1001P1AT  [EXBV4V]  113.9,6.2 180 top
RN21  ACASA2001S2001P100  [0603-ARC]  118.8,10.9 0 top
RN22  ACASA1002U1002P1AT  [0603-ARC]  83.6,94 0 top
RN23  ACASN1002U1002P1AT  [EXBV4V]  81.1,94 0 top
RX  YELLOW  [CHIP-LED0603]  118.8,21.3 270 top
S1  CL-SB-12A-01T  [CLSB12A02T]  37,92 180 top
S2  CL-SB-12A-01T  [CLSB12A02T]  37.5,69 180 top
S3  CL-SB-12A-01T  [CLSB12A02T]  37.5,45.5 180 top
S4  CL-SB-12A-01T  [CLSB12A02T]  37.5,22 180 top
S5  CL-SB-12A-01T  [CLSB12A02T]  96.5,61 180 top
S6  CL-SB-12A-01T  [CLSB12A02T]  97.5,83.5 180 top
S7  CL-SB-12A-01T  [CLSB12A02T]  138,80 0 top
S8  CL-SB-12A-01T  [CLSB12A02T]  138,56 0 top
S9  CL-SB-12A-01T  [CLSB12A02T]  137.5,33 0 top
S10  CL-SB-12A-01T  [CLSB12A02T]  137.5,8 0 top
S11  DTSM-6  [DTSM-6]  119.8,67.3 270 top
S12  DTSM-6  [DTSM-6]  119.8,79.1 270 top
TLC1  TLC2274QD  [SOIC127P600X175-14N]  23.5,90 90 top
TLC2  TLC2274QD  [SOIC127P600X175-14N]  24,67 90 top
TLC3  TLC2274QD  [SOIC127P600X175-14N]  24,43.5 90 top
TLC4  TLC2274QD  [SOIC127P600X175-14N]  24.5,20.5 90 top
TLC5  TLC2274QD  [SOIC127P600X175-14N]  83.5,60 90 top
TLC6  TLC2274QD  [SOIC127P600X175-14N]  84.5,82.5 90 top
TLC7  TLC2274QD  [SOIC127P600X175-14N]  151,81 270 top
TLC8  TLC2274QD  [SOIC127P600X175-14N]  151,57.5 270 top
TLC9  TLC2274QD  [SOIC127P600X175-14N]  150.5,34 270 top
TLC10  TLC2274QD  [SOIC127P600X175-14N]  150.5,9 270 top
TX  YELLOW  [CHIP-LED0603]  118.8,19.3 270 top
U1  TLC2272CD  [SOIC127P599X175-8N]  46.5,88 90 top
U2  TLC2272CD  [SOIC127P599X175-8N]  47,65.5 90 top
U3  TLC2272CD  [SOIC127P599X175-8N]  47,42 90 top
U4  TLC2272CD  [SOIC127P599X175-8N]  47,16.5 90 top
U5  TLC2272CD  [SOIC127P599X175-8N]  106,56 90 top
U6  TLC2272CD  [SOIC127P599X175-8N]  107,78.5 90 top
U7  TLC2272CD  [SOIC127P599X175-8N]  128.5,85 270 top
U8  TLC2272CD  [SOIC127P599X175-8N]  128.5,60.5 270 top
U9  TLC2272CD  [SOIC127P599X175-8N]  128,37 270 top
U10  TLC2272CD  [SOIC127P599X175-8N]  128.5,11 270 top

## Library data of the parts
AD1-AD10 = analog-devices; MPN: AD623ARZ.; OC_FARNELL: 9426213; OC_NEWARK: 31M4186
C1-C172 = rcl; SPICEPREFIX: C
C173 C177-C179 = SparkFun-Capacitors; PROD_ID: CAP-00810
C174 C175 = SparkFun-Capacitors; PROD_ID: CAP-00868
C176 = SparkFun-Capacitors; PROD_ID: CAP-11015
CH1-CH10 ERROR INFO JP1-JP11 LED1-LED60 POWER RX TX = adafruit
D1-D10 = RB886CST2RA; ARROW_PART_NUMBER: RB886CST2RA; DESCRIPTION: ROHM RB886CST2RA SMT Schottky Diode, 15V 10mA, 2-Pin SOD-923; HEIGHT: 0.4mm; MANUFACTURER_NAME: ROHM Semiconductor; MANUFACTURER_PART_NUMBER: RB886CST2RA; MOUSER_PART_NUMBER: 755-RB886CST2RA; MOUSER_PRICE-STOCK: https://www.mouser.co.uk/ProductDetail/ROHM-Semiconductor/RB886CST2RA?qs=%2FKR40Cd6GUoS%252BT8zewWQAA%3D%3D
IC1-IC8 = 74HC595DG; ARROW_PART_NUMBER: 74HC595DG; DESCRIPTION: 8-Bit Serial-Input/Serial or Parallel-Output Shift Register with Latched 3-State Outputs; HEIGHT: 1.75mm; MANUFACTURER_NAME: ON Semiconductor; MANUFACTURER_PART_NUMBER: 74HC595DG; MOUSER_PART_NUMBER: 863-74HC595DG; MOUSER_PRICE-STOCK: https://www.mouser.com/Search/Refine.aspx?Keyword=863-74HC595DG
IC9 = LP38692SD-5.0_NOPB; ARROW_PART_NUMBER: LP38692SD-5.0/NOPB; ARROW_PRICE-STOCK: https://www.arrow.com/en/products/lp38692sd-5.0nopb/texas-instruments; DESCRIPTION: 1A Low Dropout CMOS Linear Regulators, Stable with Ceramic Output Capacitors; HEIGHT: 0.8mm; MANUFACTURER_NAME: Texas Instruments; MANUFACTURER_PART_NUMBER: LP38692SD-5.0/NOPB; MOUSER_PART_NUMBER: 926-LP38692SD50NOPB; MOUSER_PRICE-STOCK: https://www.mouser.co.uk/ProductDetail/Texas-Instruments/LP38692SD-50-NOPB?qs=1FNqv8aZn1QNaKucJoNXMw%3D%3D
IC10 = arduino
POT1-POT10 = N6L25T3N-103-3030; ARROW_PART_NUMBER: N6L25T3N-103-3030; DESCRIPTION: Trimmer Resistors - Through Hole; HEIGHT: 5.2mm; MANUFACTURER_NAME: Amphenol; MANUFACTURER_PART_NUMBER: N6L25T3N-103-3030; MOUSER_PART_NUMBER: 531-N6L25T3N1033030
Q1 = MMBT2222A_215; ARROW_PART_NUMBER: MMBT2222A,215; ARROW_PRICE-STOCK: https://www.arrow.com/en/products/mmbt2222a215/nexperia; DESCRIPTION: MMBT2222A - NPN switching transistor; HEIGHT: 1.1mm; MANUFACTURER_NAME: Nexperia; MANUFACTURER_PART_NUMBER: MMBT2222A,215; MOUSER_PART_NUMBER: 771-MMBT2222A215; MOUSER_PRICE-STOCK: https://www.mouser.co.uk/ProductDetail/Nexperia/MMBT2222A215?qs=LOCUfHb8d9sLd6ictNLvig%3D%3D
R1-R130 R132 R133 = resistor
R131 R134-R144 = rcl; SPICEPREFIX: R
RN1-RN23 = resistor-dil; OC_FARNELL: unknown; OC_NEWARK: unknown
S1-S10 = CL-SB-12A-01T; ARROW_PART_NUMBER: CL-SB-12A-01T; DESCRIPTION: Slide switch, 1 pole, 2 position; HEIGHT: 2.5mm; MANUFACTURER_NAME: Copal Electronics; MANUFACTURER_PART_NUMBER: CL-SB-12A-01T
S11 S12 = switch-tact
TLC1-TLC10 = TLC2274QD; AVAILABILITY: Warning; DESCRIPTION: Quad Low-Noise Rail-To-Rail Operational Amplifier 14-SOIC -40 to 125; MF: Texas Instruments; MOUSER-PURCHASE-URL: https://snapeda.com/shop?store=Mouser&id=1157542; MP: TLC2274QD; PACKAGE: SOIC-14 Texas Instruments; PRICE: None; TEXAS_INSTRUMENTS-PURCHASE-URL: https://snapeda.com/shop?store=Texas+Instruments&id=1157542
U1-U10 = TLC2272CD; ARROW_ELECTRONICS-PURCHASE-URL: https://snapeda.com/shop?store=Arrow+Electronics&id=49079; AVAILABILITY: Good; DESCRIPTION: Dual, Low-Noise, Rail-To-Rail Operational Amplifier 8-SOIC 0 to 70; DIGIKEY-PURCHASE-URL: https://snapeda.com/shop?store=DigiKey&id=49079; MF: Texas Instruments; MOUSER-PURCHASE-URL: https://snapeda.com/shop?store=Mouser&id=49079; MP: TLC2272CD; PACKAGE: SOIC-8 Texas Instruments; PRICE: None; TEXAS_INSTRUMENTS-PURCHASE-URL: https://snapeda.com/shop?store=Texas+Instruments&id=49079

## Nets
1IN1-: C7.2 C8.1 R8.2 TLC1.2
1IN2-: R4.2 R5.2 TLC1.6
1IN3-: R10.1 R11.1 TLC1.9
1OUT1: C8.2 POT1.1 R8.1 TLC1.1
1OUT2: D1.2 R5.1 TLC1.7
1OUT3: R11.2 S1.3 TLC1.8
1OUT4: TLC1.14
2IN1-: C18.2 C20.1 R17.2 TLC2.2
2IN2-: R18.2 R19.2 TLC2.6
2IN3-: R21.1 R22.1 TLC2.9
2OUT1: C20.2 POT2.1 R17.1 TLC2.1
2OUT2: D2.2 R19.1 TLC2.7
2OUT3: R22.2 S2.3 TLC2.8
2OUT4: TLC2.14
3IN1-: C34.2 C36.1 R30.2 TLC3.2
3IN2-: R31.2 R32.2 TLC3.6
3IN3-: R34.1 R35.1 TLC3.9
3OUT1: C36.2 POT3.1 R30.1 TLC3.1
3OUT2: D3.2 R32.1 TLC3.7
3OUT3: R35.2 S3.3 TLC3.8
3OUT4: TLC3.14
4IN1-: C52.2 C54.1 R43.2 TLC4.2
4IN2-: R44.2 R45.2 TLC4.6
4IN3-: R47.1 R48.1 TLC4.9
4OUT1: C54.2 POT4.1 R43.1 TLC4.1
4OUT2: D4.2 R45.1 TLC4.7
4OUT3: R48.2 S4.3 TLC4.8
4OUT4: TLC4.14
5IN1-: C71.2 C73.1 R58.2 TLC5.2
5IN2-: R59.2 R60.2 TLC5.6
5IN3-: R62.1 R63.1 TLC5.9
5OUT1: C73.2 POT5.1 R58.1 TLC5.1
5OUT2: D5.2 R60.1 TLC5.7
5OUT3: R63.2 S5.3 TLC5.8
5OUT4: TLC5.14
6IN1-: C87.2 C89.1 R71.2 TLC6.2
6IN2-: R72.2 R73.2 TLC6.6
6IN3-: R75.1 R76.1 TLC6.9
6OUT1: C89.2 POT6.1 R71.1 TLC6.1
6OUT2: D6.2 R73.1 TLC6.7
6OUT3: R76.2 S6.3 TLC6.8
6OUT4: TLC6.14
7IN1-: C103.2 C105.1 R84.2 TLC7.2
7IN2-: R85.2 R86.2 TLC7.6
7IN3-: R88.1 R89.1 TLC7.9
7OUT1: C105.2 POT7.1 R84.1 TLC7.1
7OUT2: D7.2 R86.1 TLC7.7
7OUT3: R89.2 S7.3 TLC7.8
7OUT4: TLC7.14
8IN1-: C119.2 C121.1 R97.2 TLC8.2
8IN2-: R98.2 R99.2 TLC8.6
8IN3-: R101.1 R102.1 TLC8.9
8OUT1: C121.2 POT8.1 R97.1 TLC8.1
8OUT2: D8.2 R99.1 TLC8.7
8OUT3: R102.2 S8.3 TLC8.8
8OUT4: TLC8.14
9IN1-: C135.2 C137.1 R110.2 TLC9.2
9IN2-: R111.2 R112.2 TLC9.6
9IN3-: R114.1 R115.1 TLC9.9
9OUT1: C137.2 POT9.1 R110.1 TLC9.1
9OUT2: D9.2 R112.1 TLC9.7
9OUT3: R115.2 S9.3 TLC9.8
9OUT4: TLC9.14
10IN1-: C151.2 C153.1 R123.2 TLC10.2
10IN2-: R124.2 R125.2 TLC10.6
10IN3-: R127.1 R128.1 TLC10.9
10OUT1: C153.2 POT10.1 R123.1 TLC10.1
10OUT2: D10.2 R125.1 TLC10.7
10OUT3: R128.2 S10.3 TLC10.8
10OUT4: TLC10.14
+3V3: IC10.2
A0: IC10.7 U1.6 U1.7
A1: IC10.8 U2.6 U2.7
A2: IC10.9 U3.6 U3.7
A3: IC10.10 U4.6 U4.7
A4: IC10.11 U5.6 U5.7
A5: IC10.12 U6.6 U6.7
A6: IC10.13 U7.6 U7.7
A7: IC10.14 U8.6 U8.7
A8: IC10.15 U9.6 U9.7
A9: IC10.16 U10.6 U10.7
CLOCK: IC1.11 IC2.11 IC3.11 IC4.11 IC5.11 IC6.11 IC7.11 IC8.11 IC10.34
D5: IC10.36 R133.1 S12.3 S12.4
D6: IC10.37 R132.1 S11.3 S11.4
D7: IC10.38 JP11.1 RN23.4
D8: IC10.39 JP11.2 RN23.3
D9: IC10.40 JP11.3 RN22.8
D10: IC10.41 JP11.4 RN22.7
D11: IC10.42 JP11.5 RN22.6
D12: IC10.43 JP11.6 RN22.5
D13: IC10.44 R144.2
DATA: IC1.14 IC10.33
GND [New Class]: AD1.4 AD2.4 AD3.4 AD4.4 AD5.4 AD6.4 AD7.4 AD8.4 AD9.4 AD10.4 C5.2 C6.1 C9.2 C11.2 C14.1 C15.2 C16.1 C17.1 C19.1 C21.2 C22.2 C24.1 C25.2 C26.2 C27.1 C31.2 C32.1 C33.1 C35.1 C37.2 C38.1 C39.1 C40.2 C42.1 C43.2 C44.2 C45.1 C49.2 C50.1 C51.1 C53.1 C55.2 C56.2 C58.1 C59.2 C60.2 C61.1 C65.2 C66.1 C67.2 C68.1 C69.2 C70.1 C72.1 C74.2 C75.2 C77.1 C78.2 C79.2 C80.1 C84.2 C85.1 C86.1 C88.1 C90.2 C91.2 C93.1 C94.2 C95.2 C96.1 C100.2 C101.1 C102.1 C104.1 C106.2 C107.2 C109.1 C110.2 C111.2 C112.1 C116.2 C117.1 C118.1 C120.1 C122.2 C123.2 C125.1 C126.2 C127.2 C128.1 C132.2 C133.1 C134.1 C136.1 C138.2 C139.2 C141.1 C142.2 C143.2 C144.1 C148.2 C149.1 C150.1 C152.1 C154.2 C155.2 C157.1 C158.2 C159.2 C160.1 C161.2 C162.2 C163.2 C164.2 C165.2 C166.2 C167.2 C168.2 C169.2 C170.1 C171.- C172.- C173.2 C174.2 C175.2 C176.2 C177.1 C178.2 C179.2 ERROR.C IC1.8 IC1.13 IC2.8 IC2.13 IC3.8 IC3.13 IC4.8 IC4.13 IC5.8 IC5.13 IC6.8 IC6.13 IC7.8 IC7.13 IC8.8 IC8.13 IC9.2 IC9.7 IC10.4 IC10.5 IC10.45 IC10.81 IC10.82 INFO.C JP11.8 LED1.C LED2.C LED3.C LED4.C LED5.C LED6.C LED7.C LED8.C LED9.C LED10.C LED11.C LED12.C LED13.C LED14.C LED15.C LED16.C LED17.C LED18.C LED19.C LED20.C LED21.C LED22.C LED23.C LED24.C LED25.C LED26.C LED27.C LED28.C LED29.C LED30.C LED31.C LED32.C LED33.C LED34.C LED35.C LED36.C LED37.C LED38.C LED39.C LED40.C LED41.C LED42.C LED43.C LED44.C LED45.C LED46.C LED47.C LED48.C LED49.C LED50.C LED51.C LED52.C LED53.C LED54.C LED55.C LED56.C LED57.C LED58.C LED59.C LED60.C POWER.C R9.1 R20.1 R24.2 R33.1 R37.2 R46.1 R50.2 R55.2 R61.1 R65.2 R74.1 R78.2 R87.1 R91.2 R100.1 R104.2 R113.1 R117.2 R126.1 R130.2 R132.2 R133.2 R134.1 R135.1 R136.1 R137.1 R138.1 R139.1 R140.1 R141.1 R142.1 R143.1 RN22.1 RN22.2 RN22.3 RN22.4 RN23.1 RN23.2 RX.C TLC1.5 TLC1.11 TLC2.5 TLC2.11 TLC3.5 TLC3.11 TLC4.5 TLC4.11 TLC5.5 TLC5.11 TLC6.5 TLC6.11 TLC7.5 TLC7.11 TLC8.5 TLC8.11 TLC9.5 TLC9.11 TLC10.5 TLC10.11 TX.C U1.4 U2.4 U3.4 U4.4 U5.4 U6.4 U7.4 U8.4 U9.4 U10.4
LATCH: IC1.12 IC2.12 IC3.12 IC4.12 IC5.12 IC6.12 IC7.12 IC8.12 IC10.35
N$1: AD1.3 C1.2 C2.1 R2.2
N$2: AD1.2 C2.2 C3.1 R3.2
N$3: AD1.1 R6.2
N$4: AD1.8 R6.1
N$5: C7.1 R7.2
N$6: C10.1 POT1.2 R10.2
N$7: JP1.1 R3.1
N$8: JP1.3 R1.2 R2.1
N$9: JP1.2 R1.1
N$10: C10.2 R4.1
N$11: C14.2 D1.1 R9.2 S1.1
N$12: S1.2 U1.5
N$13: C67.1 R54.2 R55.1 U1.3
N$14: AD2.3 C4.2 C12.1 R13.2
N$15: AD2.2 C12.2 C13.1 R14.2
N$16: AD1.6 R7.1
N$17: AD2.1 R15.2
N$18: AD2.8 R15.1
N$19: JP2.1 R14.1
N$20: JP2.3 R12.2 R13.1
N$21: JP2.2 R12.1
N$22: AD2.6 R16.1
N$23: C18.1 R16.2
N$24: C23.1 POT2.2 R21.2
N$25: C23.2 R18.1
N$26: C24.2 D2.1 R20.2 S2.1
N$27: S2.2 U2.5
N$28: C26.1 R23.2 R24.1 U2.3
N$29: AD3.3 C28.2 C29.1 R26.2
N$30: AD3.2 C29.2 C30.1 R27.2
N$31: AD3.1 R28.2
N$32: AD3.8 R28.1
N$33: JP3.1 R27.1
N$34: JP3.3 R25.2 R26.1
N$35: JP3.2 R25.1
N$36: AD3.6 R29.1
N$37: C34.1 R29.2
N$38: C41.1 POT3.2 R34.2
N$39: C41.2 R31.1
N$40: C42.2 D3.1 R33.2 S3.1
N$41: S3.2 U3.5
N$42: C44.1 R36.2 R37.1 U3.3
N$43: AD4.3 C46.2 C47.1 R39.2
N$44: AD4.2 C47.2 C48.1 R40.2
N$45: AD4.1 R41.2
N$46: AD4.8 R41.1
N$47: JP4.1 R40.1
N$48: JP4.3 R38.2 R39.1
N$49: JP4.2 R38.1
N$50: AD4.6 R42.1
N$51: C52.1 R42.2
N$52: C57.1 POT4.2 R47.2
N$53: C57.2 R44.1
N$54: C58.2 D4.1 R46.2 S4.1
N$55: S4.2 U4.5
N$56: C60.1 R49.2 R50.1 U4.3
N$57: AD5.3 C62.2 C63.1 R52.2
N$58: AD5.2 C63.2 C64.1 R53.2
N$59: AD5.1 R56.2
N$60: AD5.8 R56.1
N$61: JP5.1 R53.1
N$62: JP5.3 R51.2 R52.1
N$63: JP5.2 R51.1
N$64: AD5.6 R57.1
N$65: C71.1 R57.2
N$66: C76.1 POT5.2 R62.2
N$67: C76.2 R59.1
N$68: C77.2 D5.1 R61.2 S5.1
N$69: S5.2 U5.5
N$70: C79.1 R64.2 R65.1 U5.3
N$71: AD6.3 C81.2 C82.1 R67.2
N$72: AD6.2 C82.2 C83.1 R68.2
N$73: AD6.1 R69.2
N$74: AD6.8 R69.1
N$75: JP6.1 R68.1
N$76: JP6.3 R66.2 R67.1
N$77: JP6.2 R66.1
N$78: AD6.6 R70.1
N$79: C87.1 R70.2
N$80: C92.1 POT6.2 R75.2
N$81: C92.2 R72.1
N$82: C93.2 D6.1 R74.2 S6.1
N$83: S6.2 U6.5
N$84: C95.1 R77.2 R78.1 U6.3
N$85: AD7.3 C97.2 C98.1 R80.2
N$86: AD7.2 C98.2 C99.1 R81.2
N$87: AD7.1 R82.2
N$88: AD7.8 R82.1
N$89: JP7.1 R81.1
N$90: JP7.3 R79.2 R80.1
N$91: JP7.2 R79.1
N$92: AD7.6 R83.1
N$93: C103.1 R83.2
N$94: C108.1 POT7.2 R88.2
N$95: C108.2 R85.1
N$96: C109.2 D7.1 R87.2 S7.1
N$97: S7.2 U7.5
N$98: C111.1 R90.2 R91.1 U7.3
N$99: AD8.3 C113.2 C114.1 R93.2
N$100: AD8.2 C114.2 C115.1 R94.2
N$101: AD8.1 R95.2
N$102: AD8.8 R95.1
N$103: JP8.1 R94.1
N$104: JP8.3 R92.2 R93.1
N$105: JP8.2 R92.1
N$106: AD8.6 R96.1
N$107: C119.1 R96.2
N$108: C124.1 POT8.2 R101.2
N$109: C124.2 R98.1
N$110: C125.2 D8.1 R100.2 S8.1
N$111: S8.2 U8.5
N$112: C127.1 R103.2 R104.1 U8.3
N$113: AD9.3 C129.2 C130.1 R106.2
N$114: AD9.2 C130.2 C131.1 R107.2
N$115: AD9.1 R108.2
N$116: AD9.8 R108.1
N$117: JP9.1 R107.1
N$118: JP9.3 R105.2 R106.1
N$119: JP9.2 R105.1
N$120: AD9.6 R109.1
N$121: C135.1 R109.2
N$122: C140.1 POT9.2 R114.2
N$123: C140.2 R111.1
N$124: C141.2 D9.1 R113.2 S9.1
N$125: S9.2 U9.5
N$126: C143.1 R116.2 R117.1 U9.3
N$127: AD10.3 C145.2 C146.1 R119.2
N$128: AD10.2 C146.2 C147.1 R120.2
N$129: AD10.1 R121.2
N$130: AD10.8 R121.1
N$131: JP10.1 R120.1
N$132: JP10.3 R118.2 R119.1
N$133: JP10.2 R118.1
N$134: AD10.6 R122.1
N$135: C151.1 R122.2
N$136: C156.1 POT10.2 R127.2
N$137: C156.2 R124.1
N$138: C157.2 D10.1 R126.2 S10.1
N$139: S10.2 U10.5
N$140: C159.1 R129.2 R130.1 U10.3
N$141: LED1.A RN2.4
N$142: LED2.A RN2.3
N$143: LED3.A RN1.8
N$144: LED4.A RN1.7
N$145: LED5.A RN1.6
N$146: LED6.A RN1.5
N$147: LED7.A RN4.4
N$148: LED8.A RN4.3
N$149: LED9.A RN3.8
N$150: LED10.A RN3.7
N$151: LED11.A RN3.6
N$152: LED12.A RN3.5
N$153: LED13.A RN6.4
N$154: LED14.A RN6.3
N$155: LED15.A RN5.8
N$156: LED16.A RN5.7
N$157: LED17.A RN5.6
N$158: LED18.A RN5.5
N$159: LED19.A RN8.4
N$160: LED20.A RN8.3
N$161: LED21.A RN7.8
N$162: LED22.A RN7.7
N$163: LED23.A RN7.6
N$164: LED24.A RN7.5
N$165: LED25.A RN10.4
N$166: LED26.A RN10.3
N$167: LED27.A RN9.8
N$168: LED28.A RN9.7
N$169: LED29.A RN9.6
N$170: LED30.A RN9.5
N$171: LED31.A RN12.4
N$172: LED32.A RN12.3
N$173: LED33.A RN11.8
N$174: LED34.A RN11.7
N$175: LED35.A RN11.6
N$176: LED36.A RN11.5
N$177: IC1.15 RN2.1
N$178: IC1.1 RN2.2
N$179: IC1.2 RN1.1
N$180: IC1.3 RN1.2
N$181: IC1.4 RN1.3
N$182: IC1.5 RN1.4
N$183: IC1.6 RN4.1
N$184: IC1.7 RN4.2
N$185: IC2.15 RN3.1
N$186: IC2.1 RN3.2
N$187: IC2.2 RN3.3
N$188: IC2.3 RN3.4
N$189: IC2.4 RN6.1
N$190: IC2.5 RN6.2
N$191: IC2.6 RN5.1
N$192: IC2.7 RN5.2
N$193: IC3.15 RN5.3
N$194: IC4.15 RN10.1
N$195: IC4.1 RN10.2
N$196: IC4.2 RN9.1
N$197: IC4.3 RN9.2
N$198: IC4.4 RN9.3
N$199: IC4.5 RN9.4
N$200: LED37.A RN14.4
N$201: LED38.A RN14.3
N$202: IC5.15 RN11.1
N$203: LED39.A RN13.8
N$204: LED40.A RN13.7
N$205: LED41.A RN13.6
N$206: LED42.A RN13.5
N$207: LED43.A RN16.4
N$208: LED44.A RN16.3
N$209: LED45.A RN15.8
N$210: LED46.A RN15.7
N$211: IC3.1 RN5.4
N$212: IC3.2 RN8.1
N$213: IC3.3 RN8.2
N$214: IC3.4 RN7.1
N$215: IC3.5 RN7.2
N$216: IC3.6 RN7.3
N$217: IC3.7 RN7.4
N$218: LED47.A RN15.6
N$219: LED48.A RN15.5
N$220: LED49.A RN18.4
N$221: IC1.9 IC2.14
N$222: IC2.9 IC3.14
N$223: IC3.9 IC4.14
N$224: IC6.9 IC7.14
N$225: IC4.9 IC5.14
N$226: CH1.C R134.2
N$227: IC5.9 IC6.14
N$228: CH2.C R135.2
N$229: IC4.6 RN12.1
N$230: IC4.7 RN12.2
N$231: LED50.A RN18.3
N$232: LED51.A RN17.8
N$233: LED52.A RN17.7
N$234: LED53.A RN17.6
N$235: LED54.A RN17.5
N$236: LED55.A RN20.4
N$237: LED56.A RN20.3
N$238: LED57.A RN19.8
N$239: LED58.A RN19.7
N$240: LED59.A RN19.6
N$241: LED60.A RN19.5
N$242: IC6.15 RN13.3
N$243: IC7.9 IC8.14
N$244: CH3.C R136.2
N$245: POWER.A R131.1
N$246: CH4.C R137.2
N$247: IC5.1 RN11.2
N$248: IC5.2 RN11.3
N$249: IC5.3 RN11.4
N$250: IC5.4 RN14.1
N$251: IC5.5 RN14.2
N$252: IC5.6 RN13.1
N$253: IC5.7 RN13.2
N$254: IC6.1 RN13.4
N$255: IC6.2 RN16.1
N$256: IC6.3 RN16.2
N$257: IC6.4 RN15.1
N$258: IC6.5 RN15.2
N$259: IC6.6 RN15.3
N$260: IC6.7 RN15.4
N$261: IC7.15 RN18.1
N$262: CH5.C R138.2
N$263: CH6.C R139.2
N$264: CH7.C R140.2
N$265: CH8.C R141.2
N$266: IC7.1 RN18.2
N$267: IC7.2 RN17.1
N$268: IC7.3 RN17.2
N$269: IC7.4 RN17.3
N$270: IC7.5 RN17.4
N$271: IC7.6 RN20.1
N$272: IC7.7 RN20.2
N$273: RN21.8 RX.A
N$274: RN21.7 TX.A
N$275: ERROR.A RN21.6
N$276: INFO.A RN21.5
N$277: IC8.1 RN19.2
N$278: IC8.2 RN19.3
N$279: IC8.3 RN19.4
N$280: IC8.4 RN21.1
N$281: IC8.15 RN19.1
N$282: CH9.C R142.2
N$283: CH10.C R143.2
N$284: CH1.A CH2.A CH3.A CH4.A CH5.A CH6.A CH7.A CH8.A CH9.A CH10.A Q1.2
N$286: IC8.5 RN21.2
N$287: IC8.6 RN21.3
N$288: IC8.7 RN21.4
N$289: C178.1 Q1.1 R144.1
N$300: IC10.17
VCC [New Class]: AD1.7 AD2.7 AD3.7 AD4.7 AD5.7 AD6.7 AD7.7 AD8.7 AD9.7 AD10.7 C5.1 C9.1 C11.1 C15.1 C16.2 C21.1 C22.1 C25.1 C31.1 C32.2 C37.1 C39.2 C40.1 C43.1 C49.1 C50.2 C55.1 C56.1 C59.1 C65.1 C66.2 C69.1 C74.1 C75.1 C78.1 C84.1 C85.2 C90.1 C91.1 C94.1 C100.1 C101.2 C106.1 C107.1 C110.1 C116.1 C117.2 C122.1 C123.1 C126.1 C132.1 C133.2 C138.1 C139.1 C142.1 C148.1 C149.2 C154.1 C155.1 C158.1 C161.1 C162.1 C163.1 C164.1 C165.1 C166.1 C167.1 C168.1 C170.2 C171.+ C173.1 C174.1 C175.1 C176.1 C177.2 C179.1 IC1.10 IC1.16 IC2.10 IC2.16 IC3.10 IC3.16 IC4.10 IC4.16 IC5.10 IC5.16 IC6.10 IC6.16 IC7.10 IC7.16 IC8.10 IC8.16 IC9.4 IC9.5 IC10.3 IC10.47 IC10.48 JP11.7 Q1.3 R23.1 R36.1 R49.1 R54.1 R64.1 R77.1 R90.1 R103.1 R116.1 R129.1 R131.2 S11.1 S11.2 S12.1 S12.2 TLC1.4 TLC2.4 TLC3.4 TLC4.4 TLC5.4 TLC6.4 TLC7.4 TLC8.4 TLC9.4 TLC10.4 U1.8 U2.8 U3.8 U4.8 U5.8 U6.8 U7.8 U8.8 U9.8 U10.8
VCC/2CH1: AD1.5 C1.1 C3.2 C6.2 C38.2 C68.2 POT1.3 TLC1.3 TLC1.10 U1.1 U1.2
VCC/2CH2: AD2.5 C4.1 C13.2 C17.2 C19.2 C27.2 POT2.3 TLC2.3 TLC2.10 U2.1 U2.2
VCC/2CH3: AD3.5 C28.1 C30.2 C33.2 C35.2 C45.2 POT3.3 TLC3.3 TLC3.10 U3.1 U3.2
VCC/2CH4: AD4.5 C46.1 C48.2 C51.2 C53.2 C61.2 POT4.3 TLC4.3 TLC4.10 U4.1 U4.2
VCC/2CH5: AD5.5 C62.1 C64.2 C70.2 C72.2 C80.2 POT5.3 TLC5.3 TLC5.10 U5.1 U5.2
VCC/2CH6: AD6.5 C81.1 C83.2 C86.2 C88.2 C96.2 POT6.3 TLC6.3 TLC6.10 U6.1 U6.2
VCC/2CH7: AD7.5 C97.1 C99.2 C102.2 C104.2 C112.2 POT7.3 TLC7.3 TLC7.10 U7.1 U7.2
VCC/2CH8: AD8.5 C113.1 C115.2 C118.2 C120.2 C128.2 POT8.3 TLC8.3 TLC8.10 U8.1 U8.2
VCC/2CH9: AD9.5 C129.1 C131.2 C134.2 C136.2 C144.2 POT9.3 TLC9.3 TLC9.10 U9.1 U9.2
VCC/2CH10: AD10.5 C145.1 C147.2 C150.2 C152.2 C160.2 POT10.3 TLC10.3 TLC10.10 U10.1 U10.2
VIN: C169.1 C172.+ IC9.1 IC9.3 IC9.6 IC10.6

## Tracks (layer width: path | path; a pad name or v marks a point on that pad's centre or on a via)
1IN1-
  Top 0.254: TLC1.2 21,87.48 21,87 18.85,84.85 R8.2 C7.2 C8.1
1IN2-
  Top 0.254: R4.2 33,84.85 R5.2 31.65,87.5 31.09,87.5 30.62,87.98 28.98,87.98 27.89,86.89 27.89,86.51 27.64,86.26 26.98,86.26 26.73,86.51 26.73,86.83 TLC1.6
1IN3-
  Top 0.254: R10.1 23.35,94.5 25.5,94.5 | 25.5,94.5 26.04,93.96 TLC1.9 | R11.1 25.5,94.65 25.5,94.5
1OUT1
  Top 0.254: TLC1.1 19.69,86.69 17.15,84.15 R8.1 17.15,82.94 17.98,82.12 17.98,80.88 17.15,80.06 C8.2 17.93,78.22 19.52,78.22 19.68,78.38 19.68,78.68 POT1.1
1OUT2
  Top 0.254: D1.2 35.62,87.85 R5.1 32.24,88.61 31.18,89.68 29.38,89.68 29.22,89.52 29.22,89.44 TLC1.7
1OUT3
  Top 0.254: R11.2 27.31,94.54 27.31,93 | 27.31,93 TLC1.8 | S1.3 34.45,93.4 34.26,93.59 27.9,93.59 27.31,93
2IN1-
  Top 0.254: C20.1 C18.2 R17.2 21.46,63.61 TLC2.2
2IN2-
  Top 0.254: TLC2.6 27.23,63.83 27.23,63.51 27.48,63.26 28.14,63.26 28.38,63.5 28.5,63.5 29.72,64.72 29.72,64.82 29.88,64.98 31.67,64.98 R19.2 33,62.65 R18.2
2IN3-
  Top 0.254: TLC2.9 26.54,71.11 R22.1 R21.1
2OUT1
  Top 0.254: TLC2.1 17.15,61.48 R17.1 17.15,59.95 17.98,59.12 17.98,57.88 17.15,57.05 C20.2 17.41,56 18.18,55.22 19.52,55.22 22,57.7 POT2.1
2OUT2
  Top 0.254: TLC2.7 27.81,66.11 28.38,66.68 31.12,66.68 32.95,64.85 R19.1 36.12,64.85 D2.2
2OUT3
  Top 0.254: S2.3 34.95,70.4 34.76,70.59 28.93,70.59 TLC2.8 27.81,71.54 R22.2
3IN1-
  Top 0.254: C36.1 C34.2 R30.2 21.46,40.11 TLC3.2
3IN2-
  Top 0.254: TLC3.6 27.23,40.33 27.23,40.01 27.48,39.76 28.14,39.76 28.38,40 28.5,40 29.72,41.22 29.72,41.32 29.88,41.48 30.98,41.48 31,41.5 31.09,41.5 32.26,40.33 32.26,40 32.5,39.76 33.39,39.76 33.43,39.73 R32.2 33.5,38.35 R31.2
3IN3-
  Top 0.254: R34.1 R35.1 26.54,47.61 TLC3.9
3OUT1
  Top 0.254: POT3.1 19.68,32.18 19.68,31.88 19.52,31.72 18.18,31.72 17.41,32.5 C36.2 17.15,33.55 17.98,34.38 17.98,35.62 17.15,36.45 R30.1 19.15,39.5 20,39.5 20.19,39.69 TLC3.1
3OUT2
  Top 0.254: D3.2 36.12,41.35 R32.1 32.23,42.62 32.06,42.62 31.5,43.18 28.18,43.18 27.81,42.81 TLC3.7
3OUT3
  Top 0.254: R35.2 27.81,48.04 TLC3.8 28.42,45.98 29.85,47.4 34.5,47.4 S3.3
4IN1-
  Top 0.254: C54.1 19.38,8 19.38,10.5 C52.2 19.38,10.62 19.38,13 R43.2 19.38,13.12 21.88,13.12 21.88,18 TLC4.2
4IN2-
  Top 0.254: 33,14.5 33,15.62 33.5,15.62 R45.2 | 33,14.5 R44.2 | 33,14.5 27.12,14.5 27.12,18 TLC4.6
4IN3-
  Top 0.254: R47.1 R48.1 25.62,25.88 26.88,24.62 26.88,23 27,23 TLC4.9
4OUT1
  Top 0.254: TLC4.1 20.62,18 20.62,13.88 18.75,13.88 18,13.12 R43.1 18.5,13 18.5,9.88 18.25,9.62 17.75,9.62 17.75,8 C54.2 17.88,8 18.75,7.12 22,7.12 POT4.1
4OUT2
  Top 0.254: D4.2 36.5,16.5 35.75,17.25 33.5,17.25 R45.1 33.38,17.38 32.75,18 28.38,18 TLC4.7
4OUT3
  Top 0.254: R48.2 27.38,26 27.38,24.25 28.25,23.38 28.25,23 TLC4.8 28.12,23.62 34.88,23.62 35,23.5 S4.3
5IN1-
  Top 0.254: C73.1 C71.2 R58.2 80.96,55.61 TLC5.2
5IN2-
  Top 0.254: TLC5.6 86.73,56.83 86.73,56.17 88.92,53.98 90.12,53.98 91.25,52.85 R59.2 92,54.65 R60.2
5IN3-
  Top 0.254: R62.1 R63.1 86.04,64.61 TLC5.9
5OUT1
  Top 0.254: TLC5.1 76.15,53.98 R58.1 76.15,51.45 76.98,50.62 76.98,49.38 76.15,48.55 C73.2 76.41,47.5 77.18,46.72 78.52,46.72 78.68,46.88 78.68,48.68 POT5.1
5OUT2
  Top 0.254: TLC5.7 87.36,57.48 90.12,57.48 90.75,56.85 R60.1 94.62,56.85 D5.2
5OUT3
  Top 0.254: TLC5.8 87.31,62.5 | 87.31,62.5 87.31,65.04 R63.2 | S5.3 93.95,62.4 93.76,62.59 92.44,62.59 92.35,62.5 87.31,62.5
6IN1-
  Top 0.254: C89.1 78.84,69.53 78.84,72.48 C87.2 78.84,72.58 78.84,75.42 R71.2 78.84,75.63 81.89,78.67 81.89,80 TLC6.2
6IN2-
  Top 0.254: R73.2 93.47,77.56 93.47,75.83 93.06,75.42 R72.2 92.96,75.22 92.55,74.81 89.3,74.81 87.07,77.05 87.07,80 TLC6.6
6IN3-
  Top 0.254: R75.1 85.65,86.7 86.22,86.7 87.04,85.88 TLC6.9 87.73,85.67 87.73,85.99 87.98,86.24 89.39,86.24 R76.1
6OUT1
  Top 0.254: R71.1 77.21,75.53 77.21,76.54 80.67,80 TLC6.1 80.77,80.1 80.77,80.5 81.58,81.32 82.29,81.32 82.6,81.01 82.6,76.64 81.58,75.63 81.58,73.09 POT6.1 81.48,72.99 81.48,71 79.68,69.2 79.68,68.88 79.52,68.72 77.93,68.72 C89.2
6OUT2
  Top 0.254: D6.2 96.41,78.57 94.69,78.57 93.98,79.28 93.57,79.28 R73.1 93.47,79.39 92.86,80 88.39,80 TLC6.7
6OUT3
  Top 0.254: 93.67,85.18 88.29,85.18 TLC6.8 | S6.3 94.99,84.97 94.79,84.97 94.59,85.18 93.67,85.18 | R76.2 93.67,85.18
7IN1-
  Top 0.254: C105.1 156.66,93.94 156.66,91.1 C103.2 156.66,90.89 156.66,88.05 R84.2 156.56,87.95 153.61,85 153.61,83.48 TLC7.2
7IN2-
  Top 0.254: R85.2 142.44,88.05 142.03,87.64 142.03,85.92 R86.2 142.13,85.92 142.84,85.21 147.11,85.21 148.43,83.89 148.43,83.48 TLC7.6
7IN3-
  Top 0.254: R88.1 151.58,75.45 149.45,75.45 R89.1 149.25,75.55 149.25,77.38 148.53,78.09 148.53,78.5 TLC7.9
7OUT1
  Top 0.254: R84.1 158.29,87.95 158.29,86.93 154.83,83.48 TLC7.1 154.73,83.38 154.73,83.07 153.82,82.16 153.21,82.16 152.9,82.46 152.9,86.83 154.02,87.95 154.02,90.39 POT7.1 154.02,90.59 154.02,92.83 156.05,94.86 157.27,94.86 158.09,94.05 158.29,94.05 C105.2
7OUT2
  Top 0.254: D7.2 139.09,85 141.12,85 141.93,84.19 R86.1 142.03,84.09 142.64,83.48 144.38,83.48 145.62,83.48 147.11,83.48 TLC7.7
7OUT3
  Top 0.254: R89.2 147.62,75.55 147.62,78.09 147.21,78.5 TLC7.8 147.21,78.4 140.91,78.4 140.81,78.5 140.51,78.5 S7.3
8IN1-
  Top 0.254: C121.1 156.66,70.43 156.66,68.09 C119.2 156.66,67.89 156.66,65.55 R97.2 156.56,65.45 153.61,62.5 153.61,60.06 TLC8.2
8IN2-
  Top 0.254: R99.2 142.03,61.89 142.03,63.72 142.44,64.13 R98.2 142.54,64.13 143.15,63.52 145.59,63.52 148.43,60.67 148.43,60.06 TLC8.6
8IN3-
  Top 0.254: R101.1 151.07,52.04 149.45,52.04 R102.1 149.45,52.14 149.45,53.05 148.53,53.97 148.53,54.98 TLC8.9
8OUT1
  Top 0.254: R97.1 158.29,65.45 158.29,63.52 154.83,60.06 TLC8.1 154.83,59.86 154.83,59.66 153.82,58.64 153.21,58.64 152.9,58.95 152.9,63.31 154.02,64.43 154.02,66.87 POT8.1 154.02,67.07 154.02,69.41 155.95,71.34 157.27,71.34 158.09,70.53 158.29,70.53 C121.2
8OUT2
  Top 0.254: TLC8.7 147.14,60.02 144.38,60.02 144.25,60.15 R99.1 139.38,60.15 D8.2
8OUT3
  Top 0.254: R102.2 147.62,52.04 147.62,54.58 147.21,54.98 TLC8.8 147.11,54.98 146.5,54.37 140.71,54.37 140.51,54.58 S8.3
9IN1-
  Top 0.254: C137.1 156.66,46.92 156.66,44.59 C135.2 156.66,44.38 156.66,42.05 R110.2 156.56,41.95 153.11,38.49 153.11,36.56 TLC9.2
9IN2-
  Top 0.254: R112.2 141.52,38.39 141.52,40.22 141.93,40.62 R111.2 142.64,40.02 145.08,40.02 145.59,39.51 145.89,39.51 147.93,37.48 147.93,36.56 TLC9.6
9IN3-
  Top 0.254: R114.1 151.58,28.53 149.85,28.53 R115.1 149.85,28.64 149.85,29.25 148.03,31.07 148.03,31.48 TLC9.9
9OUT1  (via drill 0.35)
  Top 0.254: 157.38,39.62 154.33,36.56 TLC9.1 | 157.38,39.62 158.29,40.52 158.29,41.95 R110.1 | C137.2 158.29,47.03 158.09,47.03 157.27,47.84 155.95,47.84 153.51,45.4 153.51,43.57 POT9.1 | 157.38,39.62 v156.5,40.5
  Bottom 0.254: v156.5,40.5 POT9.1
9OUT2
  Top 0.254: D9.2 138.58,36.97 141.12,36.97 141.42,36.66 R112.1 141.63,36.66 142.03,36.66 143.96,34.73 145.08,34.73 146.6,36.26 146.6,36.46 TLC9.7
9OUT3
  Top 0.254: R115.2 148.13,28.53 148.13,29.75 146.71,31.18 146.71,31.48 TLC9.8 146.6,31.38 140.2,31.38 140,31.58 S9.3
10IN1-
  Top 0.254: C153.1 156.66,21.99 156.66,19.55 C151.2 156.66,19.45 156.66,17.01 R123.2 156.56,16.91 153.11,13.46 153.11,11.53 TLC10.2
10IN2-
  Top 0.254: R125.2 141.52,13.36 141.52,15.18 141.93,15.59 R124.2 142.03,15.59 142.64,14.98 145.18,14.98 147.93,12.24 147.93,11.53 TLC10.6
10IN3-
  Top 0.254: R127.1 R128.1 148.84,3.6 148.84,5.23 148.03,6.04 148.03,6.45 TLC10.9
10OUT1
  Top 0.254: R123.1 158.29,16.91 158.29,15.49 154.33,11.53 TLC10.1 154.22,11.43 154.22,11.02 153.41,10.21 152.7,10.21 152.4,10.51 152.4,14.88 153.41,15.89 153.41,18.43 POT10.1 153.51,18.54 153.51,20.37 155.95,22.8 157.37,22.8 158.09,22.09 158.29,22.09 C153.2
10OUT2  (via drill 0.3)
  Top 0.254: D10.2 138.58,11.93 141.22,11.93 141.42,11.73 R125.1 141.63,11.63 v142.64,11.63 | v145.59,11.63 146.5,11.63 146.6,11.53 TLC10.7
  Bottom 0.254: v145.59,11.63 v142.64,11.63
10OUT3
  Top 0.254: R128.2 147.11,3.5 147.11,6.04 146.71,6.45 TLC10.8 146.71,6.34 140.41,6.34 140.2,6.55 140,6.55 S10.3
A0  (via drill 0.35)
  Top 0.254: U1.7 U1.6 47.83,89.78 47.83,89.41 48.03,89.21 48.78,89.21 48.87,89.3 v49.7,89.3
  Bottom 0.254: v49.7,89.3 52.74,86.26 53.41,86.26 54.02,85.65 54.02,85.25 55.55,83.72 55.95,83.72 56.56,83.11 56.56,82.47 62.03,77 63.43,77 98.39,42.04 IC10.7
A1  (via drill 0.35)
  Top 0.254: U2.7 U2.6 48.33,67.28 48.33,66.91 49.04,66.2 v50.8,66.2
  Bottom 0.254: v50.8,66.2 72,66.2 IC10.8
A2  (via drill 0.35)
  Top 0.254: U3.6 U3.7 47.63,43.21 49.28,43.21 50.27,44.2 v50.9,44.2
  Bottom 0.254: v50.9,44.2 51.26,44.2 51.84,44.78 90.88,44.78 IC10.9
A3  (via drill 0.35)
  Top 0.254: U4.7 46.38,19 47.62,19 U4.6 48.33,18.28 48.33,17.91 48.53,17.71 49.28,17.71 49.77,18.2 v50.5,18.2
  Bottom 0.254: v50.5,18.2 65.2,32.9 89.2,32.9 91.08,34.78 IC10.10
A4
  Top 0.254: U5.7 U5.6 105.94,57.78 105.94,52.47 105.74,52.27 101.67,52.27 100.93,51.52 100.93,49.5 97.52,46.09 90.59,46.09 88.54,44.04 IC10.11
A5